# Altium PCB CT9042 Main Board.PcbDoc (part 1 of 2)
Units mm, origin at the board's own origin, x right, y up, seen from the top; angles counter-clockwise.
Board outline 242.29 x 155.23 mm, 4 copper layers (Top Layer, Layer 1, Layer 2, Bottom Layer), stack 1.794 mm thick; 436 components, 347 nets, 1449 pads, 165 vias.
Unrouted connection lines stored in the file: 759.
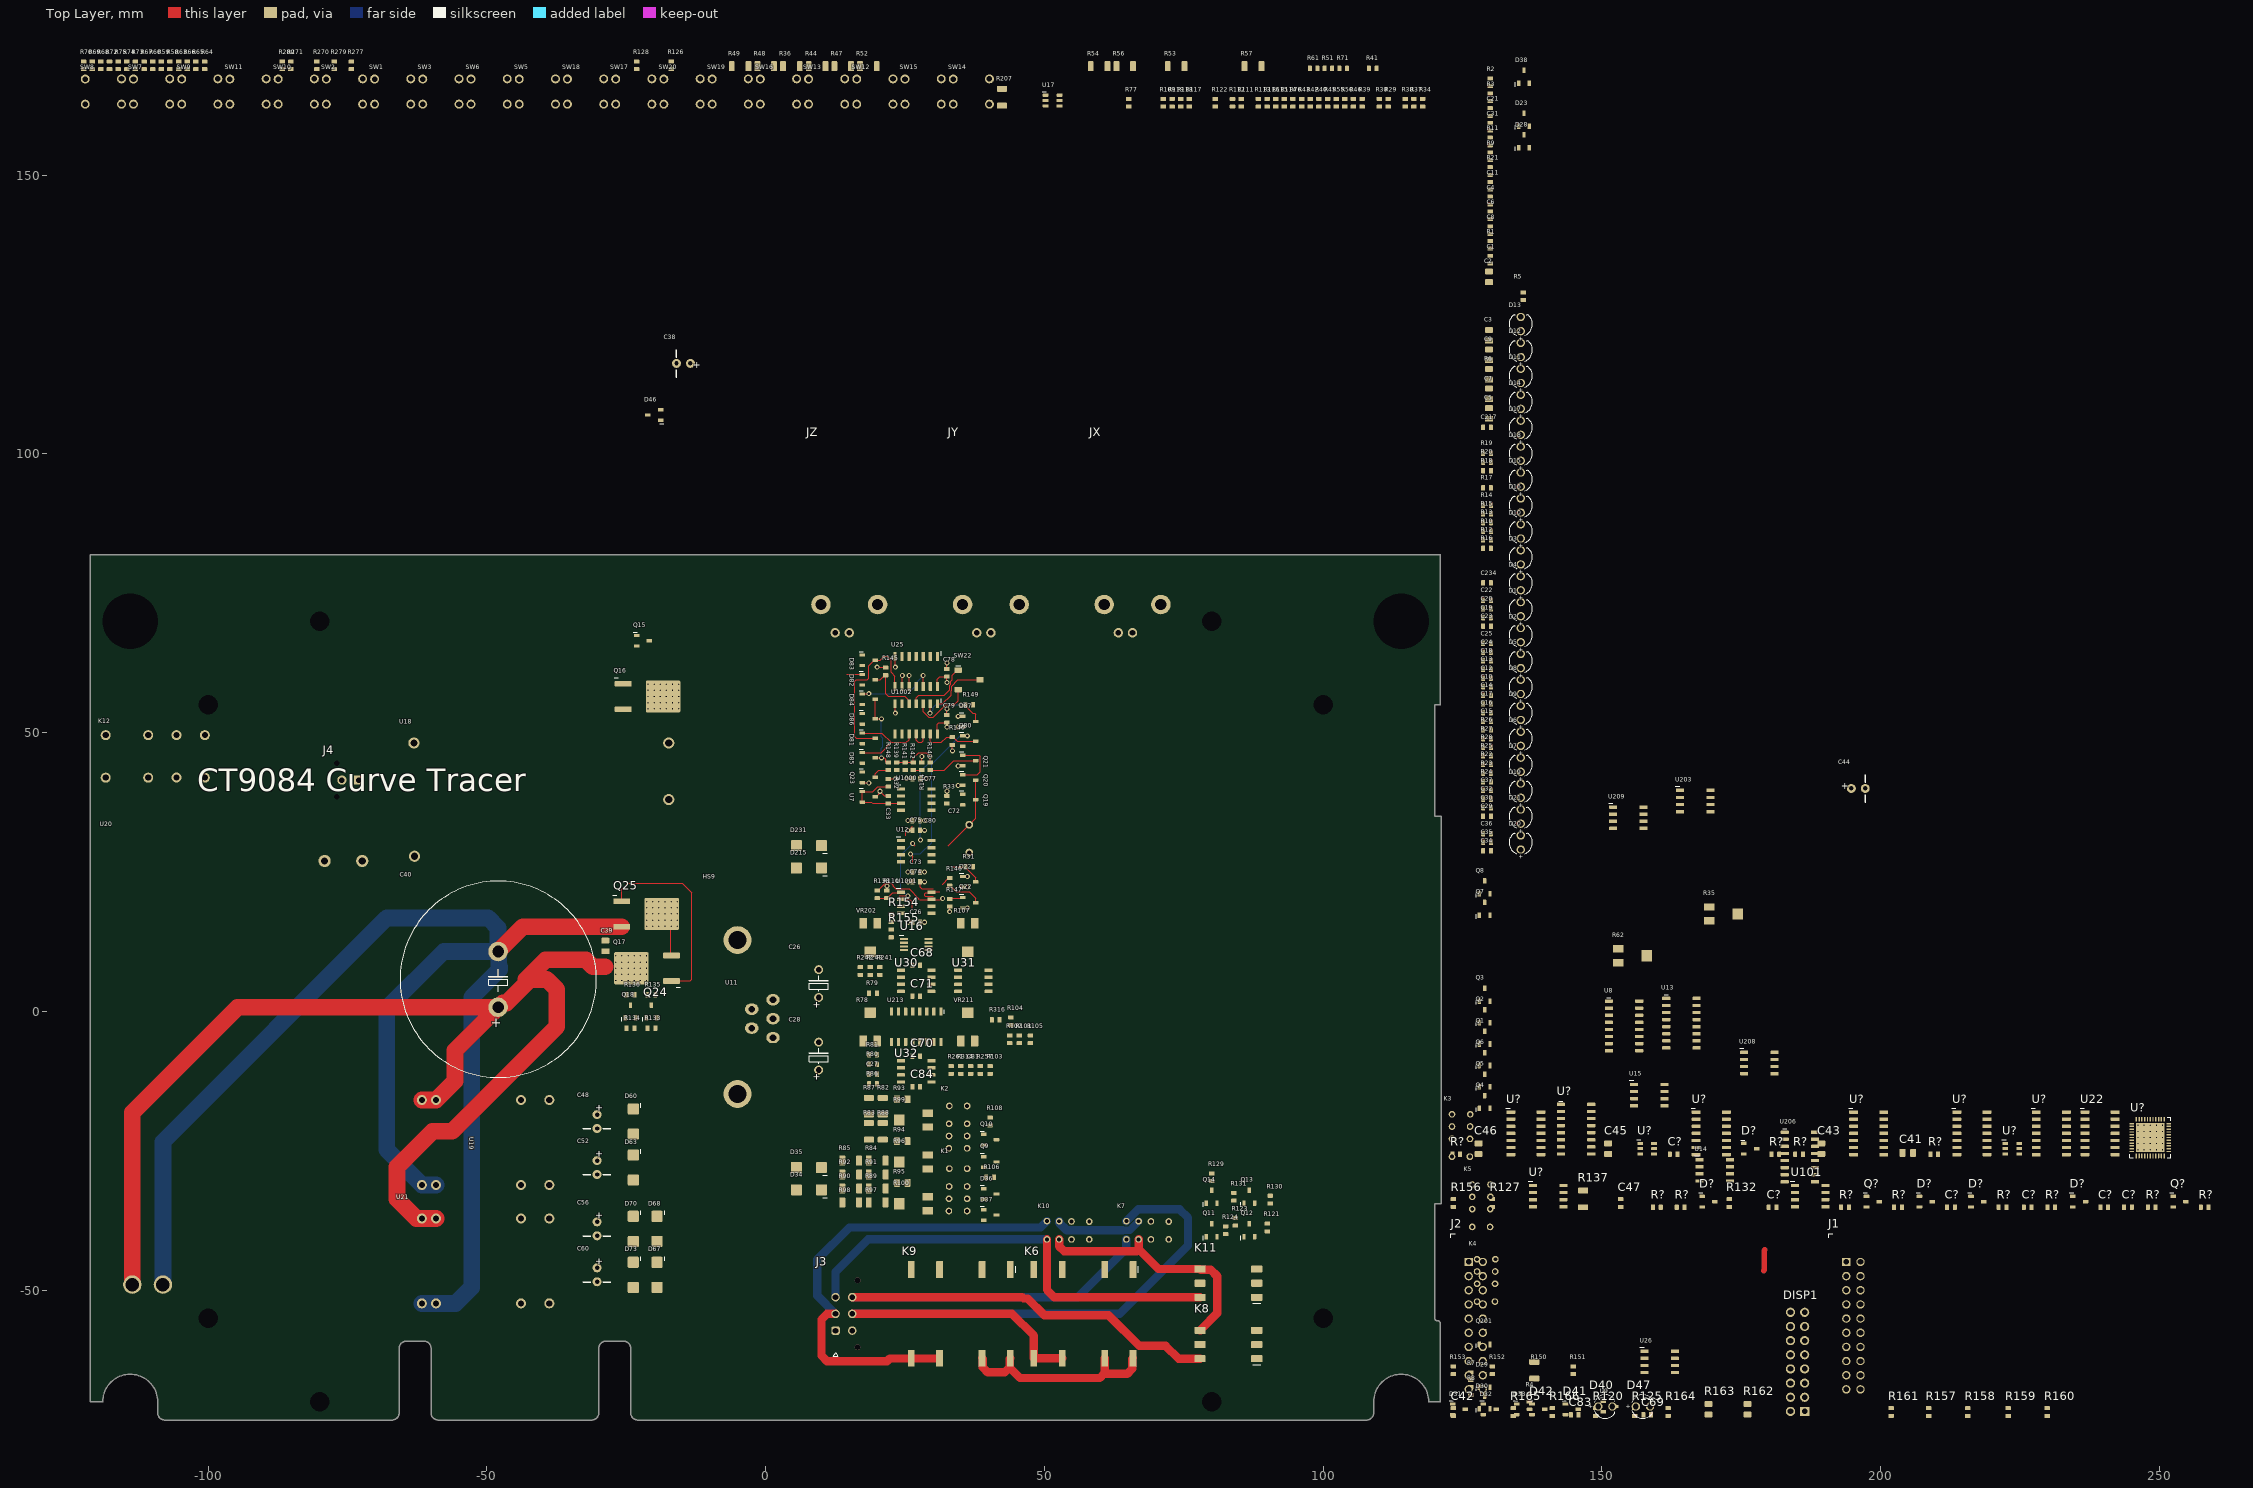
[diagram p0: Top Layer view]
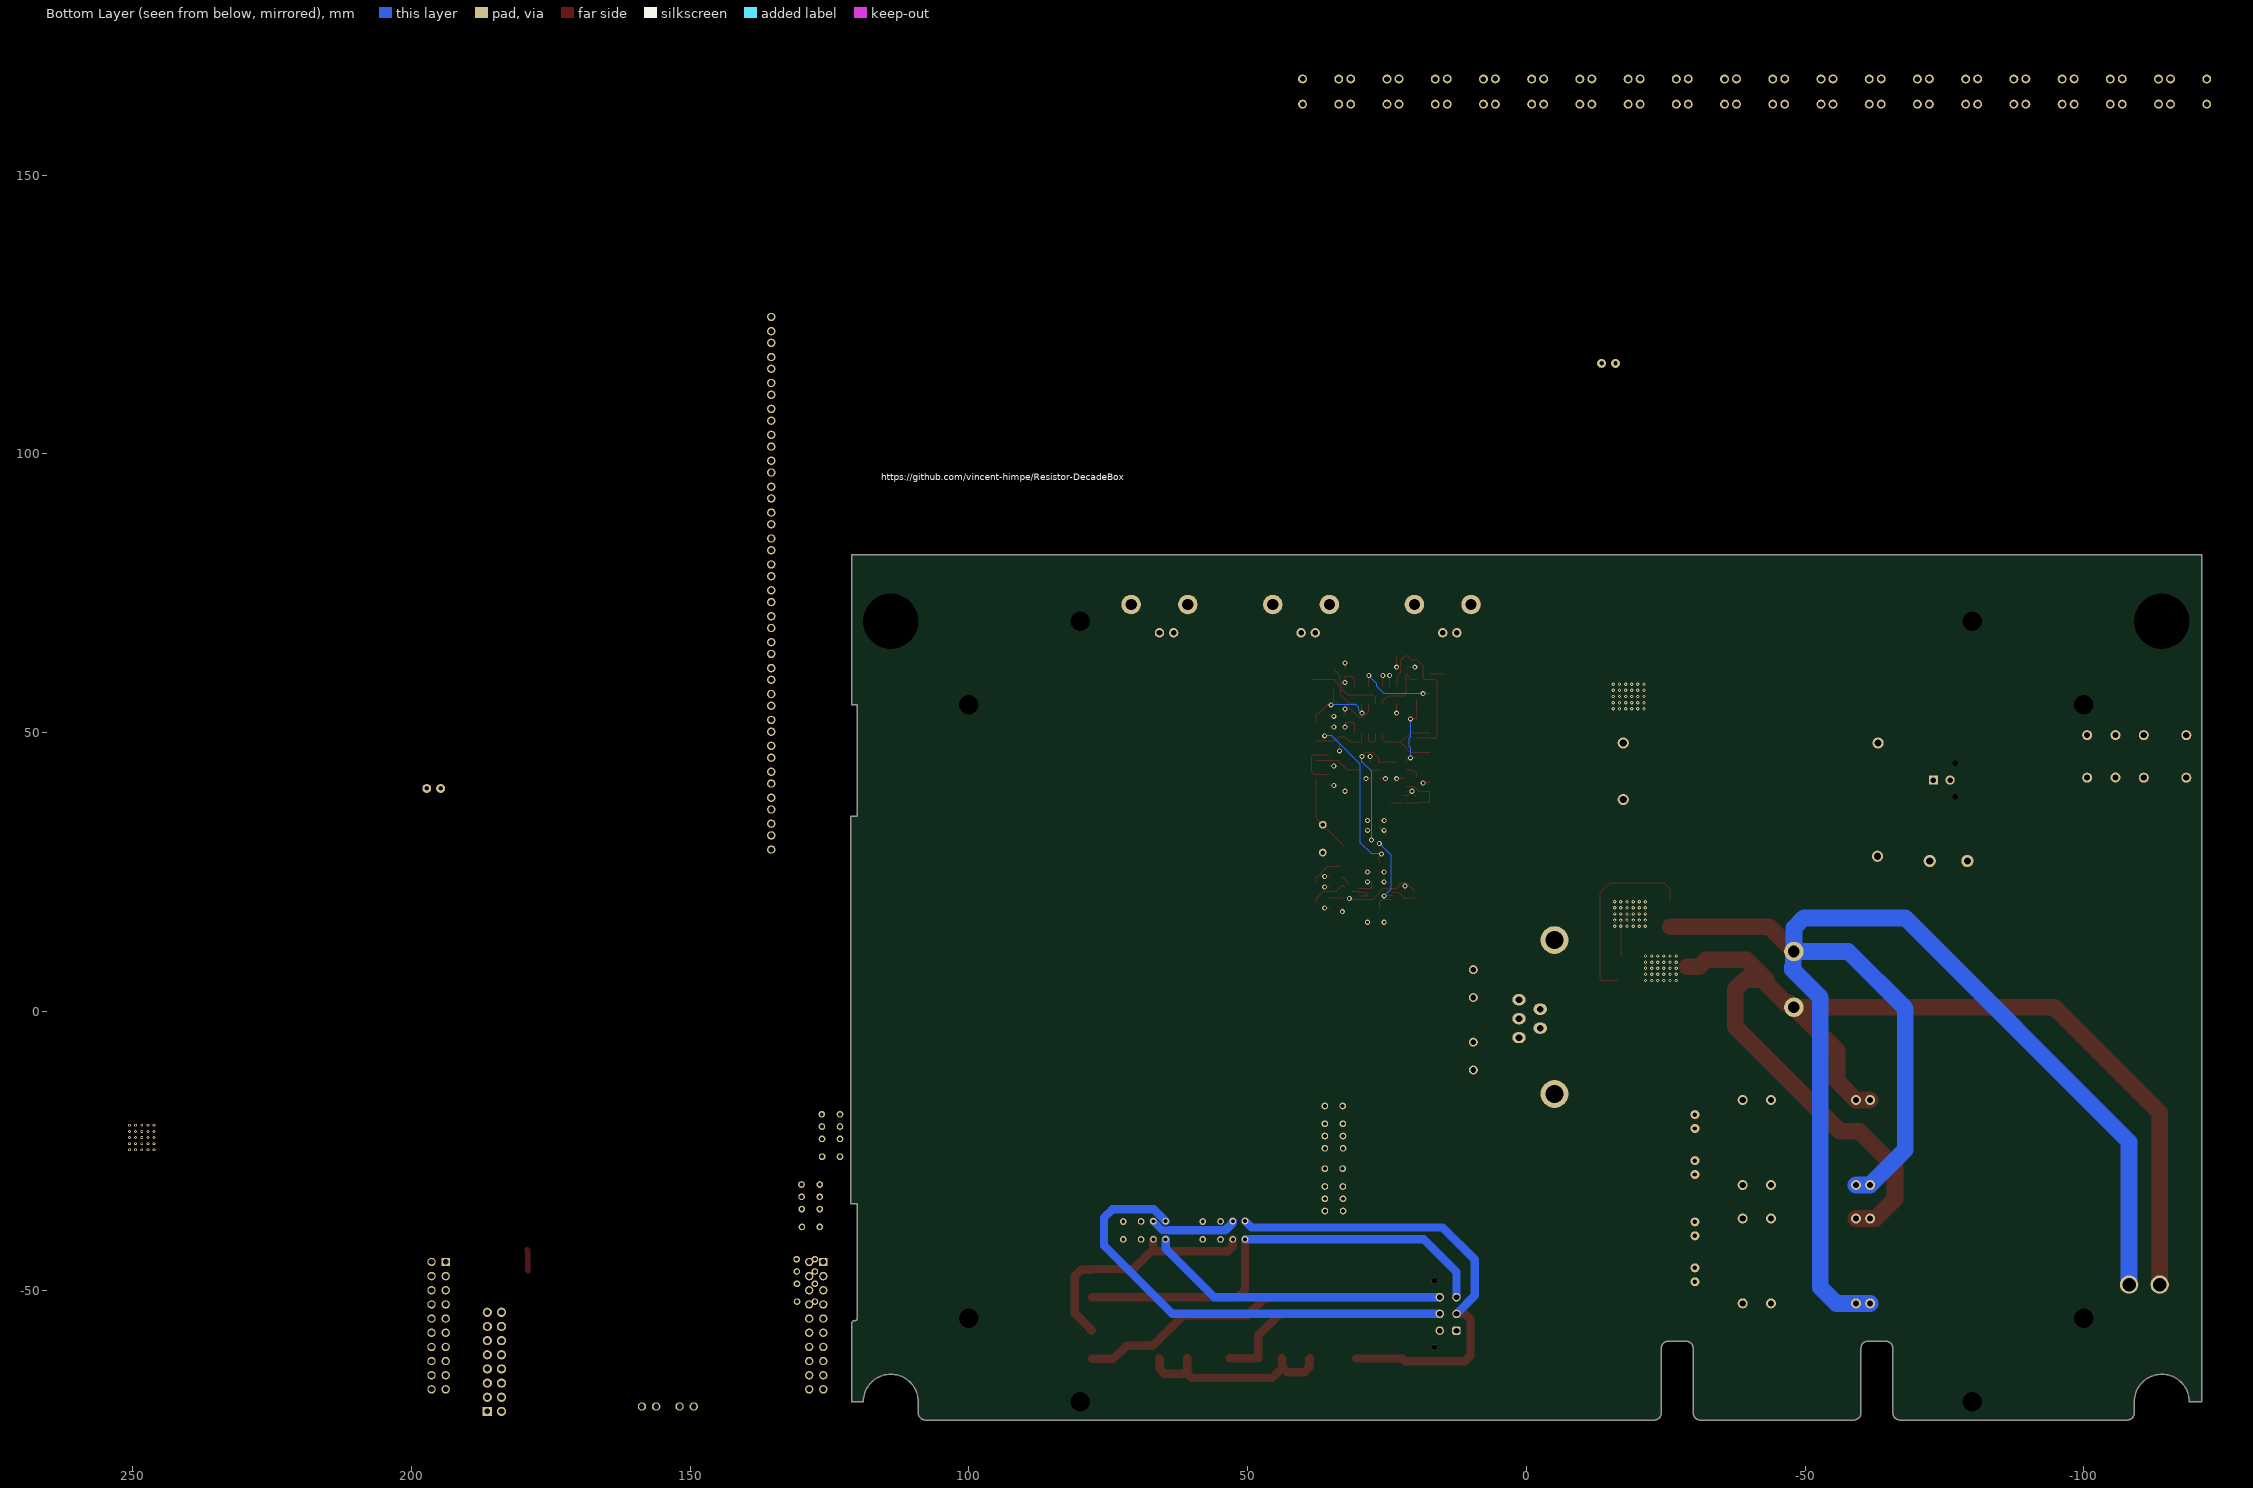
[diagram p1: Bottom Layer view, seen from below]
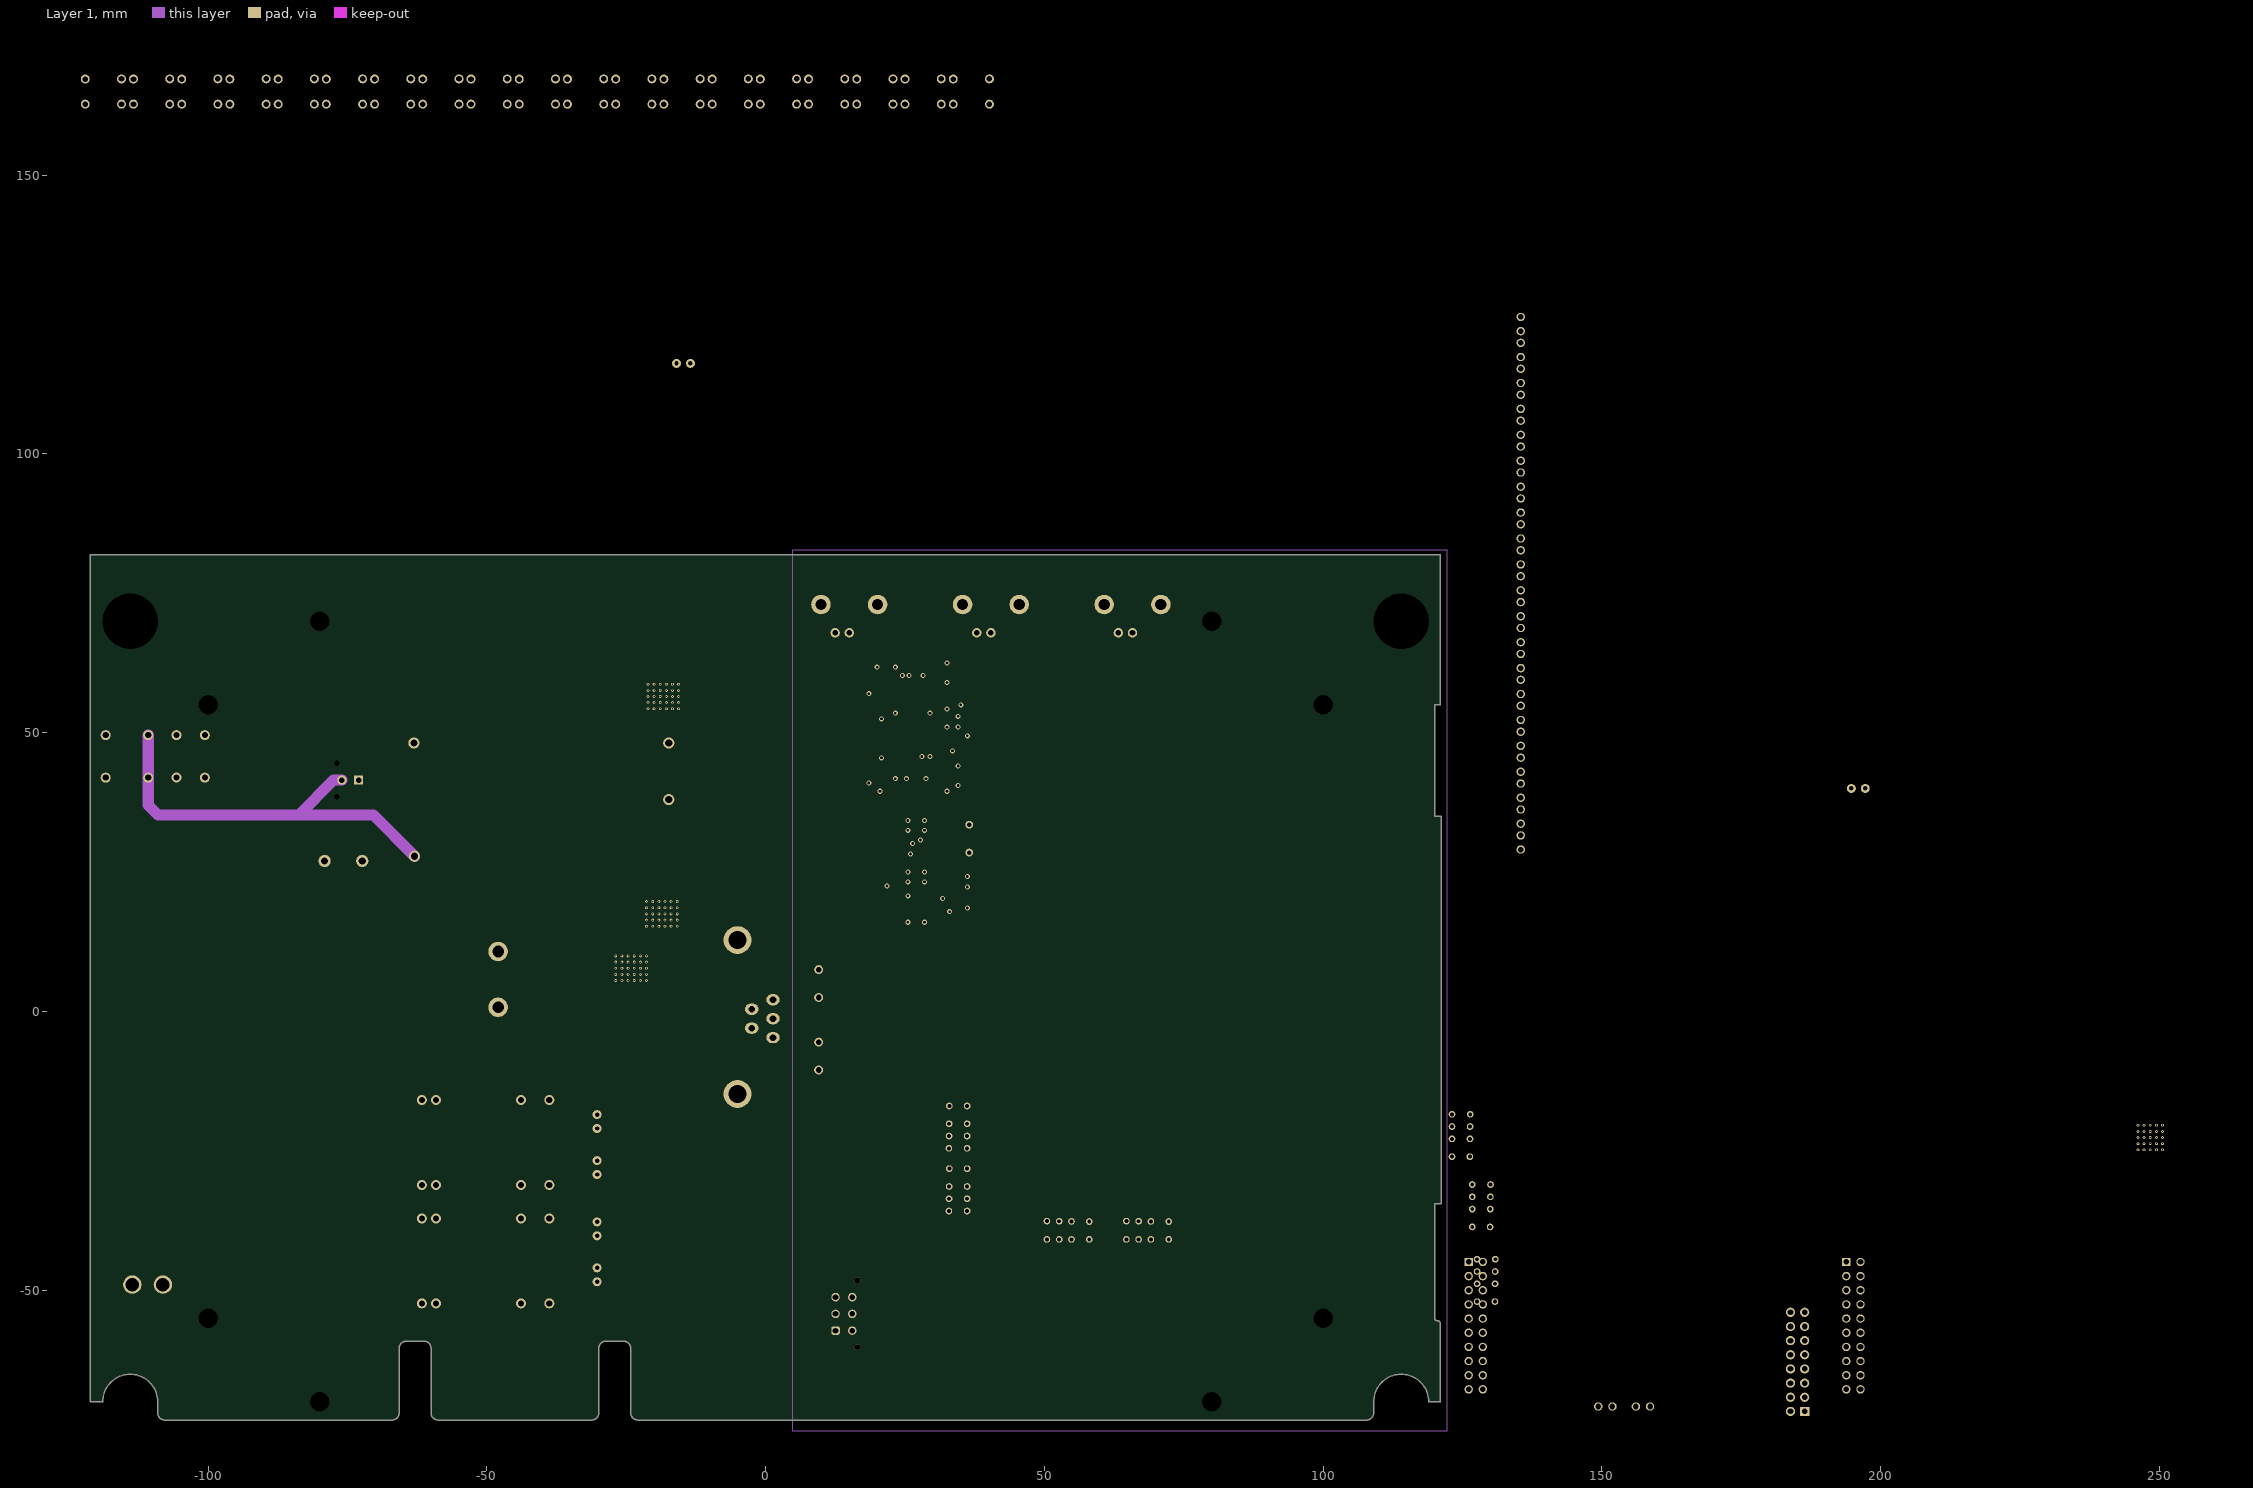
[diagram p2: Layer 1]
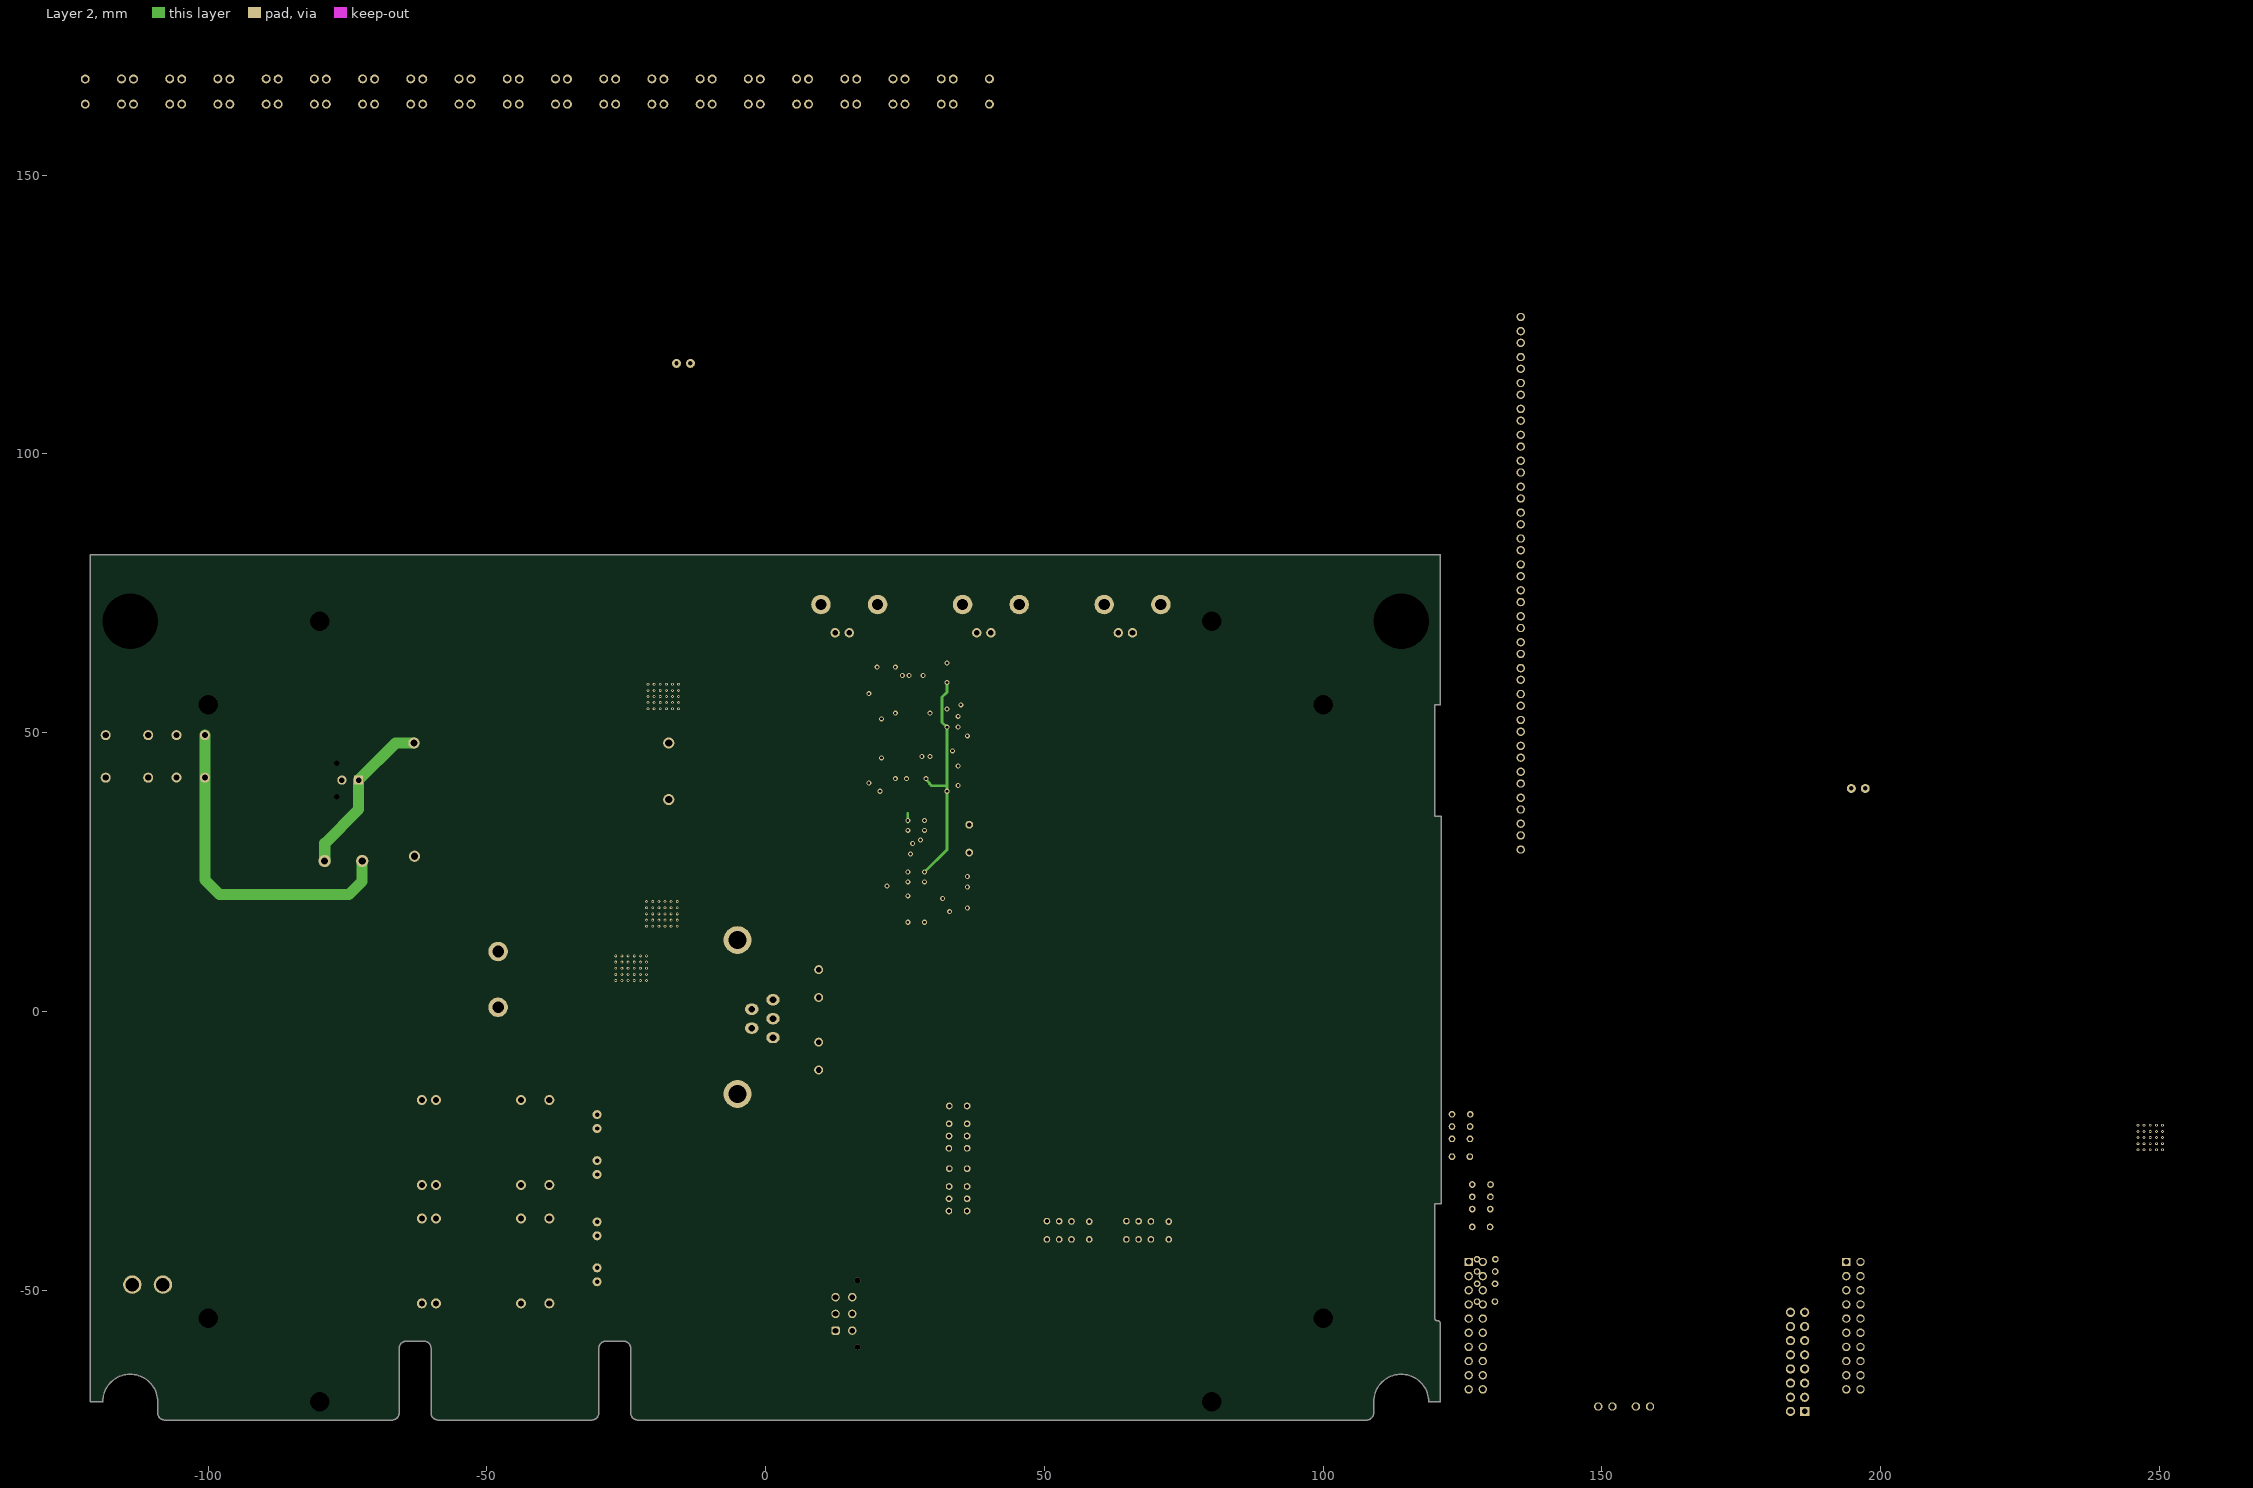
[diagram p3: Layer 2]

## Layer stack, top to bottom
Top Solder: solder mask 0.0102, Solder Resist, Dk 3.5
Top Layer: signal copper 0.0356
Dielectric 2: prepreg 0.1016, Core-009, Dk 4.5
Layer 1: signal copper 0.035
Dielectric 1: dielectric 1.45, FR-4, Dk 4.8
Layer 2: signal copper 0.035
Dielectric 3: prepreg 0.1016, Core-009, Dk 4.5
Bottom Layer: signal copper 0.0356
Bottom Solder: solder mask 0.0102, Solder Resist, Dk 3.5

## Board outline
-109.069,-72.005 ccw(c-107.774,-72.005) -107.774,-73.3 -67.045,-73.3 ccw(c-67.045,-72.005) -65.75,-72.005 -65.75,-60.401 cw(c-64.505,-60.401) -64.505,-59.157 -61.273,-59.157 cw(c-61.273,-60.401) -60.028,-60.401 -60.028,-72.005 ccw(c-58.733,-72.005) -58.733,-73.3 -31.232,-73.3 ccw(c-31.232,-72.005) -29.937,-72.005 -29.937,-60.401 cw(c-28.692,-60.401) -28.692,-59.157 -25.46,-59.157 cw(c-25.46,-60.401) -24.216,-60.401 -24.216,-72.005 ccw(c-22.92,-72.005) -22.92,-73.3 107.774,-73.3 107.775,-73.3 ccw(c107.774,-72.005) 109.069,-72.005 109.069,-70.508 109.075,-70.489 109.075,-70 cw(c114,-70) 118.925,-70 118.95,-70.025 121,-70.025 121.025,-70 121.025,-56 ccw(c120.5,-56) 120.5,-55.475 cw(c120.5,-55) 120.025,-55 120.025,-34.525 121.125,-34.525 121.15,-34.5 121.15,35 121.125,35.025 120.025,35.025 120.025,54.975 121,54.975 121.025,55 121.025,81.9 121,81.925 -121.111,81.925 -121.136,81.9 -121.136,-70 -121.111,-70.025 -118.95,-70.025 -118.925,-70 cw(c-114,-70) -109.075,-70 -109.075,-70.489 -109.069,-70.508

## Design rules (kind name [scope] priority, off if disabled: settings)
Clearance [All] p1: gap=0.15 ignorepadtopadclearanceinfootprint=FALSE
ComponentClearance [All] p1 off: gap=0.254 collisioncheckmode=3 verticalgap=0.254 showdistances=FALSE
Height [All] p1 off: minheight=0 maxheight=25.4 prefheight=12.7
MinimumSolderMaskSliver [All] p1: minsoldermaskwidth=0.1
PolygonConnect [All] p1: connectstyle=Relief reliefconductorwidth=0.254 reliefentries=4 polygonreliefangle="90 Angle" airgapwidth=0.254
RoutingVias [All] p1: holewidth=0.9 width=0.9 viastyle="Through Hole" minholewidth=0.2 minwidth=0.5 maxholewidth=0.5 maxwidth=1
SolderMaskExpansion [All] p1: expansion=0.102 istentingtop=FALSE
SupplyNets "Schematic Supply Nets_6" [InNet('N48V')] p1: voltage=0.000
SupplyNets "Schematic Supply Nets_17" [InNet('P15VA')] p2: voltage=0.000
SupplyNets "Schematic Supply Nets_15" [InNet('FGND')] p3: voltage=0.000
SupplyNets "Schematic Supply Nets_14" [InNet('N5VA')] p4: voltage=0.000
SupplyNets "Schematic Supply Nets_13" [InNet('AGND')] p5: voltage=0.000
SupplyNets "Schematic Supply Nets_11" [InNet('GND')] p6: voltage=0.000
SupplyNets "Schematic Supply Nets_10" [InNet('P5VA')] p7: voltage=0.000
SupplyNets "Schematic Supply Nets_7" [InNet('FP5VD')] p8: voltage=0.000
SupplyNets "Schematic Supply Nets_4" [InNet('VREF')] p9: voltage=0.000
SupplyNets "Schematic Supply Nets_3" [InNet('P5VD')] p10: voltage=0.000
SupplyNets "Schematic Supply Nets_2" [InNet('P48V')] p11: voltage=0.000
SupplyNets "Schematic Supply Nets_1" [InNet('P5VREL')] p12: voltage=0.000
SupplyNets "Schematic Supply Nets" [InNet('N15VA')] p13: voltage=0.000
Width [All] p1: maxlimit=3 minlimit=0.15 preferedwidth=0.2
27 further rules are at their usual default settings.

## Classes and differential pairs
component class "CT9042 Toplevel": JX JY JZ
component class U_SWEEP: C33 C72 C73 C74 C75 C76 C77 C78 C79 C80 D22 D80 D81 D82 D83 D84 D85 D86 D87 D217 D220 D221 D222 D223 D224 D225 D226 D227 D228 D229 Q19 Q20 Q21 Q22 Q23 Q217 R31 R32 R33 R110 R138 R139 R140 R141 R142 R143 R144 R145 R146 R147 R148 R149 R154 R155 SW22 U7 U12 U16 U25 U1000 U1001 U1002
component class U_PSU: * *1 *2 C38 C39 C40 C42 C44 C48 C52 C56 C60 D41 D42 D46 D60 D63 D67 D68 D70 D73 J4 J9 K12 Q15 Q16 Q17 Q18 Q24 Q25 R120 R125 R133 R134 R135 R136 U18 U19 U20 U21
component class U_PROCESSOR: C41 C43 C45 C46 C? D? R? U4 U5 U6 U22 U?
component class U_POWERMUX: D39 D43 D44 D45 J3 J5 J6 J7 J8 K6 K7 K8 K9 K10 K11 P1 P2 P3 P4 P5 P6 Q11 Q12 Q13 Q14 R119 R121 R122 R123 R124 R126 R128 R129 R130 R131 U17
component class U_POWERAMP: C26 C27 C28 C68 C69 C70 C71 C81 C83 C84 D34 D35 D36 D37 D215 D231 HS9 K1 K2 Q9 Q10 R78 R79 R80 R81 R82 R83 R84 R85 R86 R87 R88 R89 R90 R91 R92 R93 R94 R95 R96 R97 R98 R99 R100 R101 R102 R103 R104 R105 R106 R107 R108 R241 R242 R243 R257 R261 R314 R316 U11 U30 U31 U32 U213 VR202 VR211
component class U_MULTIPLIER: C29 C30 C31 C32 C34 C35 C36 C37 C47 C217 C? D38 D? Q? R109 R111 R112 R113 R114 R115 R116 R117 R118 R127 R132 R137 R150 R151 R152 R153 R156 R270 R271 R277 R279 R280 R? U13 U14 U15 U26 U101 U?
component class U_IBVG-DRIVER: C10 C11 C12 C13 C14 C15 C16 C17 C18 C19 C20 C21 C22 C23 C24 C25 C234 D23 D24 D25 D26 D27 D28 D29 D30 D31 D32 D33 K3 K4 K5 Q2 Q3 Q4 Q5 Q6 Q7 Q8 Q201 R34 R35 R36 R37 R38 R39 R40 R41 R42 R43 R44 R45 R46 R47 R48 R49 R50 R51 R52 R53 R54 R55 R56 R57 R58 R59 R60 R61 R62 R63 R64 R65 R66 R67 R68 R69 R70 R71 R72 R73 R74 R75 R76 R77 R207 U8 U9 U10 U203 U206 U208 U209
component class U_FrontPanel: C1 C2 C3 C4 C5 C6 C7 C8 C9 D1 D2 D3 D4 D5 D6 D7 D8 D9 D10 D11 D12 D13 D14 D15 D16 D17 D18 D19 D20 D21 D40 D47 DISP1 J1 J2 Q1 R1 R2 R3 R4 R5 R6 R7 R8 R9 R10 R11 R12 R13 R14 R15 R16 R17 R18 R19 R20 R21 R22 R23 R24 R25 R26 R27 R28 R29 R30 R157 R158 R159 R160 R161 R162 R163 R164 R165 R166 SW1 SW2 SW3 SW4 SW5 SW6 SW7 SW8 SW9 SW10 SW11 SW12 SW13 SW14 SW15 SW16 SW17 SW18 SW19 SW20 U1 U2 U3

## Components (designator, comment, footprint, x,y, rotation, side; value= is the part's Value field where it differs from the comment)
C1 "CAP0603" CAPC0603 129.949,134.86 r90 top
C2 "CAP0805" CAPC0805 129.749,131.785 r90 top
C3 "CAP0805" CAPC0805 129.749,121.285 r90 top
C4 "CAP0603" CAPC0603 129.949,145.46 r90 top
C5 "CAP0805" CAPC0805 129.749,107.285 r90 top
C6 "CAP0603" CAPC0603 129.949,142.81 r90 top
C7 "CAP0805" CAPC0805 129.749,110.785 r90 top
C8 "CAP0603" CAPC0603 129.949,140.16 r90 top
C9 "CAP0805" CAPC0805 129.749,117.785 r90 top
C10 "CAP0603" CAPC0603 129.399,58.26 r180 top
C11 "CAP0603" CAPC0603 129.949,148.11 r90 top
C12 "CAP0603" CAPC0603 129.399,59.81 r180 top
C13 "CAP0603" CAPC0603 129.399,61.36 r180 top
C14 "CAP0603" CAPC0603 129.399,56.71 r180 top
C15 "CAP0603" CAPC0603 129.399,52.06 r180 top
C16 "CAP0603" CAPC0603 129.399,53.61 r180 top
C17 "CAP0603" CAPC0603 129.399,55.16 r180 top
C18 "CAP0603" CAPC0603 129.399,62.91 r180 top
C19 "CAP0603" CAPC0603 129.399,70.66 r180 top
C20 "CAP0603" CAPC0603 129.399,72.21 r180 top
C21 "CAP0603" CAPC0603 129.949,161.36 r90 top
C22 "CAP0603" CAPC0603 129.399,73.76 r180 top
C23 "CAP0603" CAPC0603 129.399,69.11 r180 top
C24 "CAP0603" CAPC0603 129.399,64.46 r180 top
C25 "CAP0603" CAPC0603 129.399,66.01 r180 top
C26 "CAP0603" CAPAE-KEMET-ESL476M100AH9AA 9.5,5 r90 top
C27 "CAP0603" CAPC0603 19.25,-11.25 r180 top
C28 "CAP0603" CAPAE-KEMET-ESL476M100AH9AA 9.5,-8 r90 top
C29 "CAP0603" CAPC0603 129.399,35.01 r180 top
C30 "CAP0603" CAPC0603 129.399,36.56 r180 top
C31 "CAP0603" CAPC0603 129.949,158.71 r90 top
C32 "CAP0603" CAPC0603 129.399,38.11 r180 top
C33 "CAP0603" CAPC0603 22,38 r90 top
C34 "CAP0603" CAPC0603 129.399,28.81 r180 top
C35 "CAP0603" CAPC0603 129.399,30.36 r180 top
C36 "CAP0603" CAPC0603 129.399,31.91 r180 top
C37 "CAP0603" CAPC0603 129.399,39.66 r180 top
C38 "CAP0603" CAPAE-KEMET-ESW476M035AE3AA -14.75,116.25 r180 top
C39 "CAP0805" CAPC0805 -28.75,11.75 r90 top
C40 "CAP0603" CAPAE-NICHICON-LGY2A222MELC30 -48,5.75 r90 top
C41 "CAP0805" CAPC0805 204.869,-25.365 r0 top
C42 "CAP0603" CAPC0603 123.369,-71.865 r90 top
C43 "CAP0805" CAPC0805 189.369,-24.615 r90 top
C44 "CAP0603" CAPAE-KEMET-ESW476M035AE3AA 196,40 r0 top
C45 "CAP0805" CAPC0805 151.119,-24.615 r90 top
C46 "CAP0805" CAPC0805 127.869,-24.615 r90 top
C47 "CAP0603" CAPC0603 153.369,-34.365 r90 top
C48 "CAP0603" CAPAE-KEMET-ESW476M035AE3AA -30.25,-19.75 r270 top
C52 "CAP0603" CAPAE-KEMET-ESW476M035AE3AA -30.25,-28 r270 top
C56 "CAP0603" CAPAE-KEMET-ESW476M035AE3AA -30.25,-39 r270 top
C60 "CAP0603" CAPAE-KEMET-ESW476M035AE3AA -30.25,-47.25 r270 top
C68 "CAP0603" CAPC0603 27,8.25 r180 top
C69 "CAP0603" CAPC0603 158.119,-72.365 r0 top
C70 "CAP0603" CAPC0603 27,-8 r180 top
C71 "CAP0603" CAPC0603 27,2.75 r180 top
C72 "CAPF" CAPF50P720X720 36.5,31 r270 top
C73 "CAP0603" CAPC0603 27,25 r180 top
C74 "CAP0603" CAPC0603 27,23.25 r180 top
C75 "CAP0603" CAPC0603 27,32.5 r0 top
C76 "CAP0603" CAPC0603 27,16 r180 top
C77 "CAP0603" CAPC0603 27,41.75 r180 top
C78 "CAP0603" CAPC0603 32.5,60.75 r90 top
C79 "CAP0603" CAPC0603 32.5,52.5 r90 top
C80 "CAP0603" CAPC0603 27,34.25 r180 top
C81 "CAP0603" CAPC0603 36.75,-10.5 r270 top
C83 "CAP0603" CAPC0603 145.119,-72.365 r0 top
C84 "CAP0603" CAPC0603 27,-13.5 r180 top
C217 "CAP0603" CAPC0603 129.399,104.76 r180 top
C234 "CAP0603" CAPC0603 129.399,76.86 r180 top
C? "CAP0603" CAPC0603 226.369,-35.115 r0 top
C? "CAP0603" CAPC0603 240.119,-35.115 r0 top
C? "CAP0603" CAPC0603 180.619,-35.115 r0 top
C? "CAP0603" CAPC0603 162.869,-25.615 r0 top
C? "CAP0603" CAPC0603 244.369,-35.115 r0 top
C? "CAP0603" CAPC0603 212.619,-35.115 r0 top
D1 "LED-3MM-GREEN" LED-3MM-GREEN 135.449,72.161 r90 top
D2 "LED-3MM-GREEN" LED-3MM-GREEN 135.449,67.511 r90 top
D3 "LED-3MM-GREEN" LED-3MM-GREEN 135.449,81.461 r90 top
D4 "LED-3MM-GREEN" LED-3MM-GREEN 135.449,76.811 r90 top
D5 "LED-3MM-GREEN" LED-3MM-GREEN 135.449,62.861 r90 top
D6 "LED-3MM-GREEN" LED-3MM-GREEN 135.449,48.911 r90 top
D7 "LED-3MM-GREEN" LED-3MM-GREEN 135.449,44.261 r90 top
D8 "LED-3MM-GREEN" LED-3MM-GREEN 135.449,58.211 r90 top
D9 "LED-3MM-GREEN" LED-3MM-GREEN 135.449,53.561 r90 top
D10 "LED-3MM-GREEN" LED-3MM-GREEN 135.449,86.111 r90 top
D11 "LED-3MM-GREEN" LED-3MM-GREEN 135.449,114.011 r90 top
D12 "LED-3MM-GREEN" LED-3MM-GREEN 135.449,118.661 r90 top
D13 "LED-3MM-GREEN" LED-3MM-GREEN 135.449,123.311 r90 top
D14 "LED-3MM-GREEN" LED-3MM-GREEN 135.449,109.361 r90 top
D15 "LED-3MM-GREEN" LED-3MM-GREEN 135.449,95.411 r90 top
D16 "LED-3MM-GREEN" LED-3MM-GREEN 135.449,90.761 r90 top
D17 "LED-3MM-GREEN" LED-3MM-GREEN 135.449,104.711 r90 top
D18 "LED-3MM-GREEN" LED-3MM-GREEN 135.449,100.061 r90 top
D19 "LED-3MM-GREEN" LED-3MM-GREEN 135.449,39.611 r90 top
D20 "LED-3MM-GREEN" LED-3MM-GREEN 135.449,30.311 r90 top
D21 "LED-3MM-GREEN" LED-3MM-GREEN 135.449,34.961 r90 top
D22 "CMPD6001S" SOT23 36.5,23.25 r0 top
D23 "CMPD6001S" SOT23 136.024,159.961 r90 top
D28 "CMPD6001S" SOT23 136.024,156.111 r90 top
D29 "CMPD6001S" SOT23 128.974,-66.29 r90 top
D30 "CMPD6001S" SOT23 128.974,-70.14 r90 top
D31 "BAS16" SOT23 124.369,-71.365 r0 top
D32 "BAS16" SOT23 129.869,-71.365 r0 top
D33 "BAS16" SOT23 135.869,-71.365 r0 top
D34 "NRVA4007" DO214AC 7.75,-32 r180 top
D35 "NRVA4007" DO214AC 7.75,-28 r180 top
D36 "BAS16" SOT23 40.25,-32.75 r0 top
D37 "BAS16" SOT23 40.25,-36.5 r0 top
D38 "CMPD6001S" SOT23 136.024,167.661 r90 top
D40 "LED-3MM-GREEN" LED-3MM-GREEN 150.619,-70.865 r0 top
D41 "BAS16" SOT23 144.619,-71.365 r0 top
D42 "BAS16" SOT23 138.619,-71.365 r0 top
D46 "BAS16" SOT23 -20,107 r180 top
D47 "LED-3MM-GREEN" LED-3MM-GREEN 157.369,-70.865 r0 top
D60 "NRVA4007" DO214AC -23.75,-19.75 r270 top
D63 "NRVA4007" DO214AC -23.75,-28 r270 top
D67 "NRVA4007" DO214AC -19.5,-47.25 r270 top
D68 "NRVA4007" DO214AC -19.5,-39 r270 top
D70 "NRVA4007" DO214AC -23.75,-39 r270 top
D73 "NRVA4007" DO214AC -23.75,-47.25 r270 top
D80 "BAS16" SOT23 36.5,48.5 r0 top
D81 "BAS16" SOT23 18.5,49 r0 top
D82 "BAS16" SOT23 18.5,59.5 r0 top
D83 "BAS16" SOT23 18.5,63 r0 top
D84 "BAS16" SOT23 18.5,56 r0 top
D85 "BAS16" SOT23 18.5,45.5 r0 top
D86 "BAS16" SOT23 18.5,52.5 r0 top
D87 "CMPD6001S" SOT23 36.5,52 r0 top
D215 "NRVA4007" DO214AC 7.75,25.75 r180 top
D231 "NRVA4007" DO214AC 7.75,29.75 r180 top
D? "BAS16" SOT23 169.119,-34.115 r0 top
D? "BAS16" SOT23 208.119,-34.115 r0 top
D? "BAS16" SOT23 217.369,-34.115 r0 top
D? "PESD2USB5" SOT23 176.619,-24.615 r0 top
D? "BAS16" SOT23 235.619,-34.115 r0 top
DISP1 "DISPLAY-LCD-2X40" CONNECTOR-GENERIC-PINHEADER-2X8 185.119,-62.865 r90 top
HS9 "HEATSINK-CUI-HSS01-B20-CP" HEATSINK-CUI-HSS01-B20-CP -9.5,-1 r90 top
J1 "BOXHEADER-10X2" "CONNECTOR GENERIC-BOXHEADER-2X10" 195.119,-56.365 r0 top
J2 "BOXHEADER-10X2" "CONNECTOR GENERIC-BOXHEADER-2X10" 127.369,-56.365 r0 top
J3 "CONN-MOLEX-430450613" CONN-MOLEX-430450613 14.5,-54.25 r270 top
J4 "CONNECTOR-MOLEX-43045-0202" CONN-MOLEX-430450214 -75,41.5 r90 top
JX "x" CONN-BNC-RA-TE-CONBNC002 65.8,73 r90 top locked
JY "Y" CONN-BNC-RA-TE-CONBNC002 40.4,73 r90 top locked
JZ "Z" CONN-BNC-RA-TE-CONBNC002 15,73 r90 top locked
K1 "RELAY-KEMET-UA2-5NJ" RELAY-KEMET-UA2-5NJ 34.5,-32 r270 top
K2 "RELAY-KEMET-UA2-5NJ" RELAY-KEMET-UA2-5NJ 34.5,-20.75 r270 top
K3 "RELAY-KEMET-UA2-5NJ" RELAY-KEMET-UA2-5NJ 124.75,-22.25 r90 top
K4 "RELAY-KEMET-UA2-5NJ" RELAY-KEMET-UA2-5NJ 129.25,-48.25 r90 top
K5 "RELAY-KEMET-UA2-5NJ" RELAY-KEMET-UA2-5NJ 128.388,-34.85 r90 top
K6 "RELAY-IXYS-CPC1907B" SO508P1676-8N 57,-54.25 r270 top
K7 "RELAY-KEMET-UA2-5NJ" RELAY-KEMET-UA2-5NJ 68.5,-39.25 r180 top
K8 "RELAY-IXYS-LCA701S" SO254P960-6N 83,-59.75 r90 top
K9 "RELAY-IXYS-CPC1907B" SO508P1676-8N 35,-54.25 r270 top
K10 "RELAY-KEMET-UA2-5NJ" RELAY-KEMET-UA2-5NJ 54.25,-39.25 r180 top
K11 "RELAY-IXYS-LCA701S" SO254P960-6N 83,-48.75 r90 top
K12 "RELAY-CIT-J104B2C5VDC.20S" RELAY-CIT-J104B2C5VDC.20S -109.5,45.75 r0 top
Q1 "BC847B" SOT23 128.974,-4.69 r90 top
Q2 "BC847B" SOT23 128.974,-0.84 r90 top
Q3 "BC857" SOT23 128.974,3.01 r90 top
Q4 "BC847B" SOT23 128.974,-16.24 r90 top
Q5 "BC857" SOT23 128.974,-12.39 r90 top
Q6 "BC847B" SOT23 128.974,-8.54 r90 top
Q7 "BC847B" SOT23 128.974,18.41 r90 top
Q8 "BC847B" SOT23 128.974,22.26 r90 top
Q9 "BC847B" SOT23 40.25,-27 r0 top
Q10 "BC847B" SOT23 40.25,-23 r0 top
Q11 "BC847B" SOT23 80,-39.25 r90 top
Q12 "BC847B" SOT23 86.75,-39.25 r90 top
Q13 "BC847B" SOT23 86.75,-33.25 r90 top
Q14 "BC847B" SOT23 80,-33.25 r90 top
Q15 "SI2336" SOT23 -22,66.5 r0 top
Q16 "DMP10H400" DPAK -22,56.5 r0 top
Q17 "DMN10H170" DPAK -20.5,7.75 r180 top
Q18 "BC857" SOT23 -24.25,0 r90 top
Q19 "BC857" SOT23 36.5,38 r0 top
Q20 "SI2336" SOT23 36.5,41.5 r0 top
Q21 "SI2336" SOT23 36.5,45 r0 top
Q22 "SI2336" SOT23 36.5,19.5 r0 top
Q23 "SI2336" SOT23 18.5,42 r0 top
Q24 "BC847B" SOT23 -20.5,0 r90 top
Q25 "DMP10H400" DPAK -22.25,17.5 r0 top
Q201 "BC857" SOT23 128.974,-58.59 r90 top
Q? "BC857" SOT23 198.619,-34.115 r0 top
Q? "BC857" SOT23 253.619,-34.115 r0 top
R1 "RESC0603" RESC0603 129.949,137.51 r90 top value=10K
R2 "RESC0603" RESC0603 129.949,166.66 r90 top value=10K
R3 "RESC0603" RESC0603 129.949,164.01 r90 top value=10K
R4 "RESC0603" RESC0603 137,-69.31 r90 top value=10K
R5 "RESC0603" RESC0603 135.899,128.311 r90 top value=10K
R6 "RESC0805" RESC0805 129.749,114.285 r90 top
R7 "RESC0603" RESC0603 126.474,-65.44 r90 top value=1K
R8 "RESC0603" RESC0603 126.474,-68.09 r90 top value=470R
R9 "RESC0603" RESC0603 129.949,153.41 r90 top value=470R
R10 "RESC0603" RESC0603 129.399,86.16 r180 top value=470R
R11 "RESC0603" RESC0603 129.949,156.06 r90 top value=470R
R12 "RESC0603" RESC0603 129.399,84.61 r180 top value=470R
R13 "RESC0603" RESC0603 129.399,87.71 r180 top value=470R
R14 "RESC0603" RESC0603 129.399,90.81 r180 top value=470R
R15 "RESC0603" RESC0603 129.399,89.26 r180 top value=470R
R16 "RESC0603" RESC0603 129.399,83.06 r180 top value=470R
R17 "RESC0603" RESC0603 129.399,93.91 r180 top value=470R
R18 "RESC0603" RESC0603 129.399,97.01 r180 top value=470R
R19 "RESC0603" RESC0603 129.399,100.11 r180 top value=470R
R20 "RESC0603" RESC0603 129.399,98.56 r180 top value=470R
R21 "RESC0603" RESC0603 129.949,150.76 r90 top value=470R
R22 "RESC0603" RESC0603 129.399,44.31 r180 top value=470R
R23 "RESC0603" RESC0603 129.399,42.76 r180 top value=470R
R24 "RESC0603" RESC0603 129.399,41.21 r180 top value=470R
R25 "RESC0603" RESC0603 129.399,45.86 r180 top value=470R
R26 "RESC0603" RESC0603 129.399,50.51 r180 top value=470R
R27 "RESC0603" RESC0603 129.399,48.96 r180 top value=470R
R28 "RESC0603" RESC0603 129.399,47.41 r180 top value=470R
R29 "RESC0603" RESC0603 111.639,163.008 r90 top value=10K
R30 "RESC0603" RESC0603 110.089,163.008 r90 top value=10K
R31 "RESC0603" RESC0603 36.5,26 r0 top value=511R
R32 "RESC0603" RESC0603 22,41 r270 top value=2K05
R33 "RESC0603" RESC0603 32.5,38 r270 top value=50K
R34 "RESC0603" RESC0603 117.839,163.008 r90 top value=2K37
R35 "TRIMMER-BOURNS-3214X-1-501" TRIMMER-BOURNS-3214X 171.8,17.5 r0 top value=500R
R36 "RESC1206" RESC1206 4.614,169.558 r0 top value=1K
R37 "RESC0603" RESC0603 116.289,163.008 r90 top value=2K05
R38 "RESC0603" RESC0603 114.739,163.008 r90 top value=1K27
R39 "RESC0603" RESC0603 106.989,163.008 r90 top value=10K
R40 "RESC0603" RESC0603 99.239,163.008 r90 top value=9K09
R41 "RESC0603" RESC0603 108.889,169.158 r0 top value=511R
R42 "RESC0603" RESC0603 97.689,163.008 r90 top value=10K
R43 "RESC0603" RESC0603 96.139,163.008 r90 top value=2K05
R44 "RESC1206" RESC1206 9.214,169.558 r0 top value=1K
R45 "RESC0603" RESC0603 100.789,163.008 r90 top value=1K27
R46 "RESC0603" RESC0603 105.439,163.008 r90 top value=2K49
R47 "RESC1206" RESC1206 13.814,169.558 r0 top value=18K
R48 "RESC1206" RESC1206 0.014,169.558 r0 top value=1K8
R49 "RESC1206" RESC1206 -4.586,169.558 r0 top value=200R
R50 "RESC0603" RESC0603 103.889,163.008 r90 top value=2K21
R51 "RESC0603" RESC0603 100.939,169.158 r0 top value=10K
R52 "RESC1206" RESC1206 18.414,169.558 r0 top value=18K
R53 "RESC1206" RESC1206 73.614,169.558 r0 top value=1K8
R54 "RESC1206" RESC1206 59.814,169.558 r0 top value=200R
R55 "RESC0603" RESC0603 102.339,163.008 r90 top value=2K21
R56 "RESC1206" RESC1206 64.414,169.558 r0 top value=220R
R57 "RESC1206" RESC1206 87.414,169.558 r0 top value=220R
R58 "RESC0603" RESC0603 -106.861,169.708 r90 top value=10K
R59 "RESC0603" RESC0603 -108.411,169.708 r90 top value=1K
R60 "RESC0603" RESC0603 -109.961,169.708 r90 top value=10K
R61 "RESC0603" RESC0603 98.289,169.158 r0 top value=10K
R62 "TRIMMER-BOURNS-3214X-1-501" TRIMMER-BOURNS-3214X 155.5,10 r0 top value=500R
R63 "RESC0603" RESC0603 -105.311,169.708 r90 top value=2M74
R64 "RESC0603" RESC0603 -100.661,169.708 r90 top value=4M75
R65 "RESC0603" RESC0603 -102.211,169.708 r90 top value=4K42
R66 "RESC0603" RESC0603 -103.761,169.708 r90 top value=1K
R67 "RESC0603" RESC0603 -111.511,169.708 r90 top value=10K
R68 "RESC0603" RESC0603 -119.261,169.708 r90 top value=10K
R69 "RESC0603" RESC0603 -120.811,169.708 r90 top value=2K05
R70 "RESC0603" RESC0603 -122.361,169.708 r90 top value=10K
R71 "RESC0603" RESC0603 103.589,169.158 r0 top value=10K
R72 "RESC0603" RESC0603 -117.711,169.708 r90 top value=2K05
R73 "RESC0603" RESC0603 -113.061,169.708 r90 top value=1K
R74 "RESC0603" RESC0603 -114.611,169.708 r90 top value=2K49
R75 "RESC0603" RESC0603 -116.161,169.708 r90 top value=2K49
R76 "RESC0603" RESC0603 94.589,163.008 r90 top value=10K
R77 "RESC0603" RESC0603 65.139,163.008 r90 top value=2K05
R78 "TRIMMER-BOURNS-3214X-1-103E" TRIMMER-BOURNS-3214X 18.75,-2.75 r90 top value=10K
R79 "RESC0603" RESC0603 19.25,3.25 r180 top value=2M74
R80 "RESC0603" RESC0603 19.25,-9.5 r180 top value=44K2
R81 "RESC0603" RESC0603 19.25,-7.75 r0 top value=2K21
R82 "RESC1206" RESC1206 21,-17 r270 top value=1K8
R83 "RESC1206" RESC1206 18.5,-21.5 r270 top value=180R
R84 "RESC1206" RESC1206 20,-26.75 r180 top value=20R
R85 "RESC1206" RESC1206 15.25,-26.75 r180 top value=20R
R86 "RESC0603" RESC0603 19.25,-13 r180 top value=2K21
R87 "RESC1206" RESC1206 18.5,-17 r270 top value=1K8
R88 "RESC1206" RESC1206 21,-21.5 r270 top value=180R
R89 "RESC1206" RESC1206 20,-31.75 r180 top value=20R
R90 "RESC1206" RESC1206 15.25,-31.75 r180 top value=20R
R91 "RESC1206" RESC1206 20,-29.25 r180 top value=20R
R92 "RESC1206" RESC1206 15.25,-29.25 r180 top value=20R
R93 "RESC0805" RESC0805 24.5,-15.75 r0 top value=2K49
R94 "RESC0805" RESC0805 24.5,-23.25 r180 top value=1K54
R95 "RESC0805" RESC0805 24.5,-30.75 r180 top value=1K54
R96 "TRIMMER-BOURNS-3214X-1-102E" TRIMMER-BOURNS-3214X 26.5,-27 r180 top value=1K
R97 "RESC1206" RESC1206 20,-34.25 r180 top value=20R
R98 "RESC1206" RESC1206 15.25,-34.25 r180 top value=20R
R99 "TRIMMER-BOURNS-3214X-1-102E" TRIMMER-BOURNS-3214X 26.5,-19.5 r180 top value=1K
R100 "TRIMMER-BOURNS-3214X-1-102E" TRIMMER-BOURNS-3214X 26.5,-34.5 r180 top value=1K
R101 "RESC0603" RESC0603 45.5,-5 r90 top value=10K
R102 "RESC0603" RESC0603 43.75,-5 r90 top value=10K
R103 "RESC0603" RESC0603 40.25,-10.5 r90 top value=44K2
R104 "RESC0603" RESC0603 44,-1.75 r90 top value=511K
R105 "RESC0603" RESC0603 47.5,-5 r90 top value=1M54
R106 "RESC0603" RESC0603 40.25,-29.75 r180 top value=2K05
R107 "TRIMMER-BOURNS-3214X-1-103E" TRIMMER-BOURNS-3214X 36.25,13.25 r270 top value=10K
R108 "RESC0603" RESC0603 40.25,-19.75 r90 top value=2K05
R109 "RESC0603" RESC0603 71.339,163.008 r90 top value=1K01
R110 "RESC0603" RESC0603 21.75,21 r90 top value=10K
R111 "RESC0603" RESC0603 85.289,163.008 r90 top value=2K49
R112 "RESC0603" RESC0603 83.739,163.008 r90 top value=9K09
R113 "RESC0603" RESC0603 88.389,163.008 r90 top value=2K21
R114 "RESC0603" RESC0603 93.039,163.008 r90 top value=2K49
R115 "RESC0603" RESC0603 91.489,163.008 r90 top value=2K21
R116 "RESC0603" RESC0603 89.939,163.008 r90 top value=100K
R117 "RESC0603" RESC0603 75.989,163.008 r90 top value=4M75
R118 "RESC0603" RESC0603 74.439,163.008 r90 top value=511R
R119 "RESC0603" RESC0603 72.889,163.008 r90 top value=511R
R120 "RESC0603" RESC0603 148.869,-71.865 r90 top value=10K
R121 "RESC0603" RESC0603 90,-38.75 r90 top value=1K
R122 "RESC0603" RESC0603 80.639,163.008 r90 top value=511R
R123 "RESC0603" RESC0603 84.25,-37.75 r270 top value=1K
R124 "RESC0603" RESC0603 82.5,-39.25 r270 top value=10K
R125 "RESC0603" RESC0603 155.869,-71.865 r90 top value=10K
R126 "RESC0603" RESC0603 -16.961,169.708 r90 top value=511R
R127 "RESC0603" RESC0603 130.369,-34.365 r90 top value=10K
R128 "RESC0603" RESC0603 -23.161,169.708 r90 top value=511R
R129 "RESC0603" RESC0603 80,-29.75 r90 top value=1K
R130 "RESC0603" RESC0603 90.5,-33.75 r90 top value=1K
R131 "RESC0603" RESC0603 84,-33.25 r90 top value=10K
R132 "RESC0603" RESC0603 172.869,-34.365 r90 top value=10K
R133 "RESC0603" RESC0603 -20.5,-3 r0 top value=10K
R134 "RESC0603" RESC0603 -24.25,-3 r0 top value=51K1
R135 "RESC0603" RESC0603 -20.5,3 r0 top value=1K
R136 "RESC0603" RESC0603 -24.25,3 r0 top value=51K1
R137 "RESC1206" RESC1206 146.619,-33.615 r90 top value=1K
R138 "RESC0603" RESC0603 20,21 r90 top value=10K
R139 "RESC0603" RESC0603 23.5,44 r270 top value=10K
R140 "RESC0603" RESC0603 33.5,48.5 r270 top value=10K
R141 "RESC0603" RESC0603 25,44 r270 top value=10K
R142 "RESC0603" RESC0603 26.5,44 r270 top value=10K
R143 "RESC0603" RESC0603 29.5,44 r90 top value=10R
R144 "RESC0603" RESC0603 28,44 r90 top value=10K
R145 "RESC0603" RESC0603 21.5,61 r90 top value=10K
R146 "RESC0603" RESC0603 33,23.25 r270 top value=10K
R147 "RESC0603" RESC0603 33,19.5 r90 top value=10K
R148 "RESC0603" RESC0603 22,44 r90 top value=10K
R149 "RESC0603" RESC0603 36.5,55 r0 top value=511R
R150 "RESC1206" RESC1206 137.869,-64.365 r90 top value=1K
R151 "RESC0603" RESC0603 144.869,-64.365 r90 top value=10K
R152 "RESC0603" RESC0603 130.369,-64.365 r90 top value=10K
R153 "RESC0603" RESC0603 123.369,-64.365 r90 top value=10K
R154 "RESC0603" RESC0603 22.5,16.75 r270 top value=10K
R155 "RESC0603" RESC0603 22.5,14 r90 top value=10K
R156 "RESC0603" RESC0603 123.369,-34.365 r90 top value=10K
R157 "RESC0603" RESC0603 208.619,-71.865 r90 top value=10K
R158 "RESC0603" RESC0603 215.619,-71.865 r90 top value=10K
R159 "RESC0603" RESC0603 222.869,-71.865 r90 top value=10K
R160 "RESC0603" RESC0603 229.869,-71.865 r90 top value=10K
R161 "RESC0603" RESC0603 201.869,-71.865 r90 top value=470R
R162 "RESC0805" RESC0805 176.119,-71.365 r90 top
R163 "RESC0805" RESC0805 169.119,-71.365 r90 top
R164 "RESC0603" RESC0603 161.869,-71.865 r90 top value=10K
R165 "RESC0603" RESC0603 134.119,-71.865 r90 top value=470R
R166 "RESC0603" RESC0603 141.119,-71.865 r90 top value=470R
R207 "RESC1206" RESC1206 42.389,163.983 r90 top value=1K
R241 "RESC0603" RESC0603 20.5,7.25 r90 top value=4M75
R242 "RESC0603" RESC0603 17,7.25 r90 top value=10K
R243 "RESC0603" RESC0603 18.75,7.25 r90 top value=10K
R257 "RESC0603" RESC0603 38.5,-10.5 r90 top value=1K
R261 "RESC0603" RESC0603 33.25,-10.5 r90 top value=42K2
R270 "RESC0603" RESC0603 -80.511,169.708 r90 top value=100K
R271 "RESC0603" RESC0603 -85.161,169.708 r90 top value=4M75
R277 "RESC0603" RESC0603 -74.311,169.708 r90 top value=10K
R279 "RESC0603" RESC0603 -77.411,169.708 r90 top value=10K
R280 "RESC0603" RESC0603 -86.711,169.708 r90 top value=10K
R314 "RESC0603" RESC0603 35,-10.5 r270 top value=1K27
R316 "RESC0603" RESC0603 41.25,-1.5 r180 top value=2M74
R? "RESC0603" RESC0603 221.869,-35.115 r0 top value=10K
R? "RESC0603" RESC0603 159.869,-35.115 r0 top value=10K
R? "RESC0603" RESC0603 203.119,-35.115 r0 top value=10K
R? "RESC0603" RESC0603 164.119,-35.115 r0 top value=10K
R? "RESC0603" RESC0603 248.619,-35.115 r0 top value=10K
R? "RESC0603" RESC0603 230.619,-35.115 r0 top value=10K
R? "RESC0603" RESC0603 185.369,-25.615 r0 top value=10K
R? "RESC0603" RESC0603 181.119,-25.615 r0 top value=10K
R? "RESC0603" RESC0603 123.869,-25.615 r0 top value=10K
R? "RESC0603" RESC0603 258.119,-35.115 r0 top value=10K
R? "RESC0603" RESC0603 193.619,-35.115 r0 top value=10K
R? "RESC0603" RESC0603 209.619,-25.615 r0 top value=10K
SW1 "SWITCH-E-SWITCH-TL1105SFP" SWITCH-ESWITCH-TL1105SPF-1RCAP -66.911,165.008 r0 top
SW2 "SWITCH-E-SWITCH-TL1105SFP" SWITCH-ESWITCH-TL1105SPF-1RCAP -75.561,165.008 r0 top
SW3 "SWITCH-E-SWITCH-TL1105SFP" SWITCH-ESWITCH-TL1105SPF-1RCAP -58.261,165.008 r0 top
SW5 "SWITCH-E-SWITCH-TL1105SFP" SWITCH-ESWITCH-TL1105SPF-1RCAP -40.961,165.008 r0 top
SW6 "SWITCH-E-SWITCH-TL1105SFP" SWITCH-ESWITCH-TL1105SPF-1RCAP -49.611,165.008 r0 top
SW7 "SWITCH-E-SWITCH-TL1105SFP" SWITCH-ESWITCH-TL1105SPF-1RCAP -110.161,165.008 r0 top
SW8 "SWITCH-E-SWITCH-TL1105SFP" SWITCH-ESWITCH-TL1105SPF-1RCAP -118.811,165.008 r0 top
SW9 "SWITCH-E-SWITCH-TL1105SFP" SWITCH-ESWITCH-TL1105SPF-1RCAP -101.511,165.008 r0 top
SW10 "SWITCH-E-SWITCH-TL1105SFP" SWITCH-ESWITCH-TL1105SPF-1RCAP -84.211,165.008 r0 top
SW11 "SWITCH-E-SWITCH-TL1105SFP" SWITCH-ESWITCH-TL1105SPF-1RCAP -92.861,165.008 r0 top
SW12 "SWITCH-E-SWITCH-TL1105SFP" SWITCH-ESWITCH-TL1105SPF-1RCAP 19.589,165.008 r0 top
SW13 "SWITCH-E-SWITCH-TL1105SFP" SWITCH-ESWITCH-TL1105SPF-1RCAP 10.939,165.008 r0 top
SW14 "SWITCH-E-SWITCH-TL1105SFP" SWITCH-ESWITCH-TL1105SPF-1RCAP 36.889,165.008 r0 top
SW15 "SWITCH-E-SWITCH-TL1105SFP" SWITCH-ESWITCH-TL1105SPF-1RCAP 28.239,165.008 r0 top
SW16 "SWITCH-E-SWITCH-TL1105SFP" SWITCH-ESWITCH-TL1105SPF-1RCAP 2.289,165.008 r0 top
SW17 "SWITCH-E-SWITCH-TL1105SFP" SWITCH-ESWITCH-TL1105SPF-1RCAP -23.661,165.008 r0 top
SW18 "SWITCH-E-SWITCH-TL1105SFP" SWITCH-ESWITCH-TL1105SPF-1RCAP -32.311,165.008 r0 top
SW19 "SWITCH-E-SWITCH-TL1105SFP" SWITCH-ESWITCH-TL1105SPF-1RCAP -6.361,165.008 r0 top
SW20 "SWITCH-E-SWITCH-TL1105SFP" SWITCH-ESWITCH-TL1105SPF-1RCAP -15.011,165.008 r0 top
SW22 "CJS1200" SWITCH-NIDEC-CJS-1200TB1 36.5,59.5 r0 top
U7 "ATL431B 48ppm 0.5%" SOT23 18.5,38.5 r0 top
U8 "DG451" SO127P600-16N 153.975,-2.595 r0 top
U9 "ATL431B 48ppm 0.5%" SOT23 151.37,-70.865 r0 top
U11 "LM675" TO220-5-V -0.595,-1.3 r90 top
U12 "TLV7211" SO127P600-8N 27,28.75 r0 top
U13 "CD4053" SO127P600-16N 164.275,-2.095 r0 top
U14 "LM393" SO127P600-8N 170.25,-28.5 r0 top
U15 "AD633JR" SO127P600-8N 158.5,-15 r0 top
U16 "MCP4551T-103" SO65P490-8N 27,12 r0 top
U17 "IC-TI-74HC14" SOT23-6 51.464,163.408 r0 top
U18 "AC005-S05" MODULE-ADAMTECH-AC005-S05 -40.25,38 r0 top
U19 "DWN06C-05" MODULE-MEANWELL-DCWN06C -50.25,-23.5 r90 top
U20 "IRM-45-48" MODULE-MEANWELL-IRM-45-48 -93,-11 r90 top
U21 "DWN06C-15" MODULE-MEANWELL-DCWN06C -50.25,-44.75 r90 top
U22 "CD4066" SO127P600-14N 239.369,-21.865 r0 top
U25 "CD4013" SO127P600-14N 27,61 r270 top
U26 "TL081H" SO127P600-8N 160.369,-62.865 r0 top
U30 "TL082H" SO127P600-8N 27,5.5 r0 top
U31 "TL082H" SO127P600-8N 37.25,5.5 r0 top
U32 "TL082H" SO127P600-8N 27,-10.75 r0 top
U101 "TL082H" SO127P600-8N 187.369,-33.115 r0 top
U203 "LF412" SO127P600-8N 166.75,37.75 r0 top
U206 "CD4053" SO127P600-16N 185.525,-26.115 r0 top
U208 "LF412" SO127P600-8N 178.25,-9.25 r0 top
U209 "LF412" SO127P600-8N 154.75,34.75 r0 top
U213 "CD4053" SO127P600-16N 27,-2.75 r270 top
U1000 "TL082H" SO127P600-8N 27,38 r0 top
U1001 "TL082H" SO127P600-8N 27,19.5 r0 top
U1002 "74LVC14" SO127P600-14N 27,52.5 r270 top
U? "CP2102" SO127P600-16N 145.369,-21.115 r0 top
U? "TL084H" SO127P600-14N 169.619,-21.865 r0 top
U? "74V1G3157" SOT23-6 223.619,-24.615 r0 top
U? "DG470" SO127P600-8N 140.369,-33.115 r0 top
U? "ATMEGA4809" QFN50P700X700X-44-TH520X520 248.369,-22.615 r0 top
U? "TL084H" SO127P600-14N 216.369,-21.865 r0 top
U? "TL084H" SO127P600-14N 230.619,-21.865 r0 top
U? "74V1G3157" SOT23-6 158.119,-24.615 r0 top
U? "TL084H" SO127P600-14N 197.869,-21.865 r0 top
U? "TL084H" SO127P600-14N 136.369,-21.865 r0 top
VR202 "TRIMMER-BOURNS-3214X-1-104" TRIMMER-BOURNS-3214X 18.75,13.25 r270 top value=100K
VR211 "TRIMMER-BOURNS-3214X-1-103E" TRIMMER-BOURNS-3214X 36.25,-2.75 r90 top value=10K

## Footprints (in the part's own frame and the unit in brackets; to place one, negate y for a bottom-side part, rotate by r counter-clockwise, add the part's x,y. Pads: shape width x height; smd on the part's side, far side on the other; paste and mask are expansions set on the pad)
CAPAE-KEMET-ESL476M100AH9AA [mm] "CAPACITOR,ALU-EL,KEMET-ESL476M100AH9AA"
  round 1.6 hole 1 unplated: 1(-2.5,0) 2(2.5,0)
  silkscreen extent -1.38,-1.75 1.38,1.7, body extent -5.25,-5.27 5.25,5.25, height 14.02
CAPAE-KEMET-ESW476M035AE3AA [mm] "CAPACITOR,ALU-EL,KEMET-ESW476M035AE3AA"
  round 1.6 hole 0.8 unplated: 1(-1.25,0) 2(1.25,0)
  silkscreen extent 1.2,-2.45 1.3,2.45, body extent -3.37,-3.4 3.42,3.41, height 12.52
CAPAE-NICHICON-LGY2A222MELC30 [mm] "CAPACITOR,ALU-EL,SNAP-IN,NICHICON,LGY2A222MELC30"
  round 3.5 hole 2.1 unplated: 1(-5,0) 2(5,0)
  silkscreen extent -17.58,-17.63 17.63,17.58, body extent -17.5,-17.52 17.5,17.5, height 35.01
CAPC0603 [mm] "CAPACITOR, CHIP 0603 (1608) 0.5MM THICK"
  rrect25% 0.72x0.99 smd paste+0 mask+0.075: 1(-0.69,0) 2(0.69,0)
  body extent -0.81,-0.41 0.81,0.41, height 0.51
CAPC0805 [mm] "CAPACITOR, CHIP 0805 (2012) 0.85MM THICK"
  rrect25% 1.05x1.4 smd paste+0 mask+0.075: 1(-0.95,0) 2(0.95,0)
  body extent -1.01,-0.63 1.01,0.64, height 0.86
CAPF50P720X720 [mm]
  round 1.4 hole 0.8 unplated: 1(-2.5,0) 2(2.5,0)
  body extent -3.6,-3 3.6,3, height 11.01
CONN-BNC-RA-TE-CONBNC002 [mm]
  round 1.7 hole 1 paste-2539.97 mask-1: 1(-5.08,0) 2(-5.08,2.54)
  round 3.5 hole 2 paste-2539.97 mask-1: 3(0,5.08) 4(0,-5.08)
  body extent -5.82,-7.95 29.38,7.95, height 14.35
CONN-MOLEX-430450214 [mm] "CONN-MOLEX-430450214"
  rect 1.65x1.65 hole 1 mask+0.1: 1(-0.001,-1.975)
  round 1.65 hole 1 mask+0.1: 2(-0.001,1.025)
  round 0.65 hole 1 unplated mask+0.15: 3(2.999,1.975) 4(-2.999,1.975)
  body extent -3.58,-4.37 3.57,4.4, height 9.9
CONN-MOLEX-430450613 [mm]
  rrect50% 1.52x1.52 hole 1.02 mask+0.076: 1(3,-1.97)
  round 1.52 hole 1.02 mask+0.076: 2(0,-1.97) 3(-3,-1.97) 4(3,1.03) 5(0,1.03) 6(-3,1.03)
  round 1.02 hole 1.02 unplated mask+0.076: ""(-6,1.97) ""(6,1.97)
  silkscreen extent 6.93,-2.37 7.63,-1.57, body extent -6.57,-4.44 6.58,4.33, height 9.92
"CONNECTOR GENERIC-BOXHEADER-2X10" [mm] "CONNECTOR GENERIC-BOXHEADER-2X10"
  rect 1.5x1.5 hole 1 mask+0.075: 1(-1.27,11.43)
  round 1.5 hole 1 mask+0.075: 2(1.27,11.43) 3(-1.27,8.89) 4(1.27,8.89) 5(-1.27,6.35) 6(1.27,6.35) 7(-1.27,3.81) 8(1.27,3.81) 9(-1.27,1.27) 10(1.27,1.27) 11(-1.27,-1.27) 12(1.27,-1.27) 13(-1.27,-3.81) 14(1.27,-3.81) 15(-1.27,-6.35) 16(1.27,-6.35) 17(-1.27,-8.89) 18(1.27,-8.89) 19(-1.27,-11.43) 20(1.27,-11.43)
  silkscreen extent -4.45,15.76 -3.7,16.51, body extent -4.45,-16.51 4.45,16.51, height 8.81
CONNECTOR-GENERIC-PINHEADER-2X8 [mm] "CONNECTOR GENERIC-PINHEADER-2X8"
  rect 1.65x1.65 hole 1 mask+0.1: 1(-8.883,-1.258)
  round 1.65 hole 1 mask+0.1: 2(-8.883,1.282) 3(-6.343,-1.258) 4(-6.343,1.282) 5(-3.803,-1.258) 6(-3.803,1.282) 7(-1.263,-1.258) 8(-1.263,1.282) 9(1.277,-1.258) 10(1.277,1.282) 11(3.817,-1.258) 12(3.817,1.282) 13(6.357,-1.258) 14(6.357,1.282) 15(8.897,-1.258) 16(8.897,1.282)
  body extent -10.16,-2.54 10.16,2.54, height 9.26
DO214AC [mm] "DO214AC, SMA"
  rrect20% 2x2 smd mask+0.07: 1(-2.25,0) 2(2.25,0)
  silkscreen extent -3.25,1.38 -2.5,1.38, body extent -2.6,-1.45 2.6,1.45, height 2.31
DPAK [mm]
  rrect25% 3x1 smd mask+0.075: 1(-3.59,2.285) 3(-3.59,-2.285)
  rrect10% 6.2x5.8 smd paste-7 mask+0.075: 4(3.59,-0.005)
  silkscreen extent -5.2,3.37 -4.45,3.37, body extent -4.01,-3.28 5.93,3.26, height 2.34
HEATSINK-CUI-HSS01-B20-CP [mm] "HEATSINK-CUI-HSS01-B20-CP"
  round 5 hole 3.2 unplated: ME1(-13.8,-4.45) ME2(13.8,-4.45)
  body extent -24.13,-24.13 24.13,0, height 49.32
LED-3MM-GREEN [mm]
  round 1.5 hole 1: 1(1.27,0) 2(-1.27,0)
  silkscreen extent -2,-2.1 1.69,2.1, body extent -1.99,-1.96 1.63,1.96, height 5.35
MODULE-ADAMTECH-AC005-S05 [mm] "MODULE-ADAMTECH-AC005-S05"
  round 2 hole 1.3 unplated: 1(-22.86,10.16) 2(-22.735,-10.16) 3(22.86,10.16) 4(22.86,0)
  body extent -25.4,-12.65 25.4,12.7, height 17.2
MODULE-MEANWELL-DCWN06C [mm] "MODULE-MEANWELL-DCWN06C"
  round 1.8 hole 1.1 unplated: 2(-7.62,11.43) 3(-7.62,8.89) 9(-7.62,-6.35) 11(-7.62,-11.43) 14(7.62,-11.43) 16(7.62,-6.35) 22(7.62,8.89) 23(7.62,11.43)
  body extent -10.15,-15.9 10.15,15.9, height 10.2
MODULE-MEANWELL-IRM-45-48 [mm] "MODULE-MEANWELL-IRM-45-48"
  round 2.2 hole 1.3 unplated: 1(38,-13.875) 2(38,-20.625)
  round 3.3 hole 2.4 unplated: 3(-38,20.625) 4(-38,15.125)
  body extent -43.7,-25.63 43.3,26.37, height 29.51
QFN50P700X700X-44-TH520X520 [mm] "QFN, 44-Leads, Body 7.00x7.00mm, Pitch 0.50mm, Thermal Pad 5.20x5.20mm, IPC High Density"
  rrect40% 0.85x0.25 smd mask+0.05: 1(-3.3,2.5) 2(-3.3,2) 3(-3.3,1.5) 4(-3.3,1) 5(-3.3,0.5) 6(-3.3,0) 7(-3.3,-0.5) 8(-3.3,-1) 9(-3.3,-1.5) 10(-3.3,-2) 11(-3.3,-2.5) 23(3.3,-2.5) 24(3.3,-2) 25(3.3,-1.5) 26(3.3,-1) 27(3.3,-0.5) 28(3.3,0) 29(3.3,0.5) 30(3.3,1) 31(3.3,1.5) 32(3.3,2) 33(3.3,2.5)
  rrect40% 0.25x0.85 smd mask+0.05: 12(-2.5,-3.3) 13(-2,-3.3) 14(-1.5,-3.3) 15(-1,-3.3) 16(-0.5,-3.3) 17(0,-3.3) 18(0.5,-3.3) 19(1,-3.3) 20(1.5,-3.3) 21(2,-3.3) 22(2.5,-3.3) 34(2.5,3.3) 35(2,3.3) 36(1.5,3.3) 37(1,3.3) 38(0.5,3.3) 39(0,3.3) 40(-0.5,3.3) 41(-1,3.3) 42(-1.5,3.3) 43(-2,3.3) 44(-2.5,3.3)
  rrect1% 5.2x5.2 smd mask+0.05: 45(0,0)
  silkscreen extent -3.65,-3.65 3.65,3.65, body extent -3.52,-3.52 3.52,3.52, height 1
RELAY-CIT-J104B2C5VDC.20S [mm]
  round 1.8 hole 1.1 unplated: 1(-8.89,-3.81) 2(-1.27,-3.81) 3(3.81,-3.785) 4(8.89,-3.81) 5(8.89,3.81) 6(3.81,3.81) 7(-1.27,3.81) 8(-8.89,3.81)
  body extent -10.09,-4.97 10.09,4.98, height 10.96
RELAY-KEMET-UA2-5NJ [mm]
  round 1.2 hole 0.7 unplated: 1(-3.8,-1.562) 2(-0.6,-1.588) 3(1.6,-1.612) 4(3.8,-1.637) 5(3.8,1.638) 6(1.6,1.638) 7(-0.6,1.638) 8(-3.8,1.638)
  body extent -5.6,-3 5.3,3, height 8.31
RESC0603 [mm] "RESISTOR, CHIP 0603 (1608)"
  rrect25% 0.72x0.99 smd paste+0 mask+0.075: 1(-0.69,0) 2(0.69,0)
  body extent -0.8,-0.4 0.8,0.4, height 0.37
RESC0805 [mm] "RESISTOR, CHIP 0805 (2012)"
  rrect25% 1.05x1.4 smd paste+0 mask+0.075: 1(-0.95,0) 2(0.95,0)
  body extent -1,-0.63 1,0.63, height 0.47
RESC1206 [mm] "RESISTOR, CHIP 1206 (3216)"
  rrect25% 1.05x1.8 smd paste+0 mask+0.075: 1(-1.5,0) 2(1.5,0)
  body extent -1.55,-0.78 1.55,0.78, height 0.47
SO65P490-8N [mm] "MSOP8, 0.65MM PITCH, 4.90MM SPAN, 1.15MM HEIGHT"
  rrect25% 1.45x0.395 smd mask+0.075: 1(-2.2,0.975) 2(-2.2,0.325) 3(-2.2,-0.325) 4(-2.2,-0.975) 5(2.2,-0.975) 6(2.2,-0.325) 7(2.2,0.325) 8(2.2,0.975)
  silkscreen extent -3.03,1.63 -2.27,1.63, body extent -2.45,-1.5 2.45,1.5, height 1.15
SO127P600-8N [mm] "SO8"
  rrect25% 1.45x0.6 smd mask+0.075: 1(-2.725,1.905) 2(-2.725,0.635) 3(-2.725,-0.635) 4(-2.725,-1.905) 5(2.725,-1.905) 6(2.725,-0.635) 7(2.725,0.635) 8(2.725,1.905)
  silkscreen extent -3.55,2.63 -2.8,2.63, body extent -3.1,-2.5 3.1,2.5, height 1.75
SO127P600-14N [mm] "SOIC127P600X175 14N"
  rrect25% 1.6x0.6 smd mask+0.075: 1(-2.7,3.81) 2(-2.7,2.54) 3(-2.7,1.27) 4(-2.7,0) 5(-2.7,-1.27) 6(-2.7,-2.54) 7(-2.7,-3.81) 8(2.7,-3.81) 9(2.7,-2.54) 10(2.7,-1.27) 11(2.7,0) 12(2.7,1.27) 13(2.7,2.54) 14(2.7,3.81)
  silkscreen extent -3.6,4.47 -2.85,4.47, body extent -3,-4.37 3,4.38, height 1.75
SO127P600-16N [mm] "SO16"
  rrect25% 1.45x0.6 smd mask+0.075: 1(-2.725,4.445) 2(-2.725,3.175) 3(-2.725,1.905) 4(-2.725,0.635) 5(-2.725,-0.635) 6(-2.725,-1.905) 7(-2.725,-3.175) 8(-2.725,-4.445) 9(2.725,-4.445) 10(2.725,-3.175) 11(2.725,-1.905) 12(2.725,-0.635) 13(2.725,0.635) 14(2.725,1.905) 15(2.725,3.175) 16(2.725,4.445)
  silkscreen extent -3.1,5.05 -2.35,5.05, body extent -3.1,-5.05 2.9,5.05, height 1.35
SO254P960-6N [mil] "Surface Mount DIP Optocoupler  0.4 in wide"
  rrect25% 50x80 smd: 1(-100,-200) 2(0,-200) 3(100,-200) 4(100,200) 5(0,200) 6(-100,200)
  silkscreen extent -143,-228 -143,-172, body extent -169,-203 169,203, height 172
SO508P1676-8N [mm]
  rrect8% 3x1.2 smd paste+0 mask+0.05: 1(-7.95,8.89) 2(-7.95,3.81) 3(-7.95,-3.81) 4(-7.95,-8.89) 5(7.95,-8.89) 6(7.95,-3.81) 7(7.95,3.81) 8(7.95,8.89)
  silkscreen extent -8.5,9.87 -7.37,9.87, body extent -8.38,-10.54 8.38,10.54, height 3.49
SOT23 [mm] "SOT23 PACKAGE, 3 PIN"
  rrect25% 1x0.6 smd paste+0 mask+0.075: 1(-1.15,0.95) 2(-1.15,-0.95) 3(1.15,0)
  silkscreen extent -1.75,1.55 -1,1.55, body extent -1.4,-1.45 1.4,1.45, height 1.3
SOT23-6 [mm] "SOT23 PACKAGE, 6 PIN (SOT26)"
  rrect25% 1.05x0.55 smd paste+0 mask+0.05: 1(-1.25,0.95) 2(-1.25,0) 3(-1.25,-0.95) 4(1.25,-0.95) 5(1.25,0) 6(1.25,0.95)
  silkscreen extent -1.88,1.58 -1.12,1.58, body extent -1.4,-1.45 1.4,1.45, height 1.45
SWITCH-ESWITCH-TL1105SPF-1RCAP [mm] "SWTICH,TACT,MOM,WITH 1R CAP,E-SWITCH TL1105SP"
  round 1.6 hole 1: 1(-3.25,-2.25) 2(3.25,-2.25) 3(-3.25,2.25) 4(3.25,2.275)
  body extent -3.94,-3 3.94,3, height 13.5
SWITCH-NIDEC-CJS-1200TB1 [mm] "SWITCH-NIDEC-CJS-1200TB1"
  rrect20% 1.3x1 smd mask+0.05: 1(-1.95,1.739) 2(-1.95,-1.761) 3(1.95,-0.011)
  silkscreen extent -2.37,2.47 -1.55,2.47, body extent -2.1,-3.01 2.1,2.99, height 2.53
TO220-5-V [mm] "TO220,PENTAWATT,VERTICAL"
  oval 2x2.4 hole 1.2: 1(-3.4,-1.905) 2(-1.7,1.905) 3(0,-1.905) 4(1.7,1.905) 5(3.4,-1.905)
  body extent -5.12,-2.13 5.11,6.58, height 21.54
TRIMMER-BOURNS-3214X [mm] "RESSITOR,TRIMMER,BOURNS,3214X FAMILY"
  rrect7% 1.9x1.3 smd: 1(-2.55,1.25) 3(-2.55,-1.25)
  rrect5% 1.9x2 smd: 2(2.55,0)
  body extent -2.83,-2.32 2.88,2.48, height 5.31

## Part data
C1 C4 C6 C8 C10 C11 C12 C13 C14 C15 C16 C17 C18 C19 C20 C22 C24 C25 C29 C30 C31 C32 C36 C37 C68 C69 C70 C71 C73 C74 C75 C76 C77 C78 C79 C80 C83 C84 C? C? C? C? C? C?: library part CAPC-0603-100nF-50V-X7R, "CAPACITOR,CERAMIC,100nF,50V,X7R,0603", Capacitance=100nF, Dielectric=X7R, LCSC=C127833, Manufacturer 1=KEMET, Manufacturer Part Number 1=C0603C104K5RACTU, Package / Case=0603, Supplier Part Number 1=80-C0603C104K5R7867, Voltage=50V, MOUSER=80-C0603C104K5R, Supplier 1=Mouser, Supplier 2=Mouser, Supplier 3=Avnet, Supplier 4=Digikey, Supplier Part Number 2=80-C0603C104K5R7411, Supplier Part Number 3=KGM15BR71H104KT, Supplier Part Number 4=1276-1000-1-ND
C2 C3 C5 C7 C9: library part CAPC-0805-10uF-25V, "CAPACITOR,CERAMIC,10uF,25V,X5R,0805", Capacitance=10uF, Dielectric=X7R, LCSC=C3039694, Manufacturer 1=SAMSUNG, Manufacturer Part Number 1=CL21B106KAYQNNE, Package / Case="0805 (2012 metric)", Voltage=25V, MOUSER=187-CL21B106KAYQNNE
C21 C33: library part CAPC-0603-10nF-50V-X7R, "CAPACITOR,CERAMIC,10nF,50V,X7R,0603", Capacitance=10nF, Dielectric=X7R, Package / Case=0603, Voltage=50V
C23 C34 C217: library part CAPC-0603-100pF-50V-C0G, "CAPACITOR,CERAMIC,100pF,50V,C0G,0603", Capacitance=100pF, Dielectric=C0G, Package / Case=0603, Voltage=50V
C26 C28: library part CAPP-AE-47uF-100V-TH050P100D140H, "CAPACITOR,ALU,47uF,100V,TH,P5mm,D10mm,H14mm", Capacitance=47uF, Dielectric=AE, Manufacturer 1=KEMET, Manufacturer Part Number 1=ESL476M100AH9AA, Voltage=100V, DIGIKEY=399-15746-ND
C27 C234: library part CAPC-0603-10PF-50V-C0G, "CAPACITOR,CERAMIC,10pF,50V,C0G,0603", Capacitance=10pF, Dielectric=C0G, Manufacturer 1=KYOCERA, Manufacturer Part Number 1=C0603C100J5GAC, Package / Case=0603, Voltage=50V, MOUSER=80-C0603C100J5GAC
C35 C47: library part CAPC-0603-1nF-20V-C0G, "CAPACITOR,CERAMIC,1nF,50V,C0G,0603", Capacitance=1nF, Dielectric=C0G, Package / Case=0603, Voltage=50V
C38 C44 C48 C52 C56 C60: library part CAPP-AE-47uF-35V-TH025P063D125H, "CAPACITOR,ALU,47uF,35V,TH,P0.25mm,D6.3mm,H12.5mm", Capacitance=47uF, Dielectric=AE, Manufacturer 1=KEMET, Manufacturer Part Number 1=ESW476M035AE3AA, Voltage=35V
C39: library part CAPC-0805-100nF-100V, "CAPACITOR,CERAMIC,100nF,100V,X7R,0805", Capacitance=100nF, Dielectric=X7R, Package / Case="0805 (2012 metric)", Voltage=100V
C40: library part CAPP-AE-2200uF-100V-TH100P350D320H, "CAPACITOR,ALU,2200uF,100V,TH,P10mm,D35mm,H32mm,SNAP", Capacitance=2200uF, Dielectric=AE, Manufacturer 1=NICHICON, Manufacturer Part Number 1=LGY2A222MELC30, Voltage=100V
C41 C43 C45 C46: library part CAPC-0805-10nF-50V-C0G, "CAPACITOR,CERAMIC,10nF,100V,C0G,0805", Capacitance=10nF, Dielectric=C0G, Manufacturer 1=KEMET, Manufacturer Part Number 1=C0805C103K5GEC7210, Package / Case="0805 (2012 metric)", Voltage=50V, DIGIKEY=399-C0805C103K5GEC7210CT-ND
C42: library part CAPC-0603-4u7-10V-X5R, "CAPACITOR,CERAMIC,4u7,10V,X5R,0603", Capacitance=4u7, Dielectric=X5R, LCSC=C1705, Manufacturer 1=SAMSUNG, Manufacturer Part Number 1=CL10A475KP8NNNC, Package / Case=0603, Supplier Part Number 1=GRM188Z71A475KE15J, Voltage=10V, MOUSER=187-CL10A475KP8NNNC, Supplier 1="Arrow Electronics"
C72: library part CAPF-100nF-100V, "CAPACITOR,POLYPROP,100nF,100V", Capacitance=100nF, Dielectric=PP, Manufacturer 1=KEMET, Manufacturer Part Number 1=PHE426DJ6100JR05, Package / Case=CAPF50P720X720, Voltage=100V, DIGIKEY=399-11462-ND
C81: library part CAPC-0603-1n5-50V-X7R, "CAPACITOR,CERAMIC,1n5,50V,X7R,0603", Capacitance=1n5, Dielectric=X7R, Package / Case=0603, Voltage=50V
D1 D2 D3 D4 D5 D6 D7 D8 D9 D10 D11 D12 D13 D14 D15 D16 D17 D18 D19 D20 D21 D40 D47: "LED,TH,GREEN,42mCd,3MM", Manufacturer 1=WURTH, Manufacturer Part Number 1=151031VS06000, Supplier Part Number 1=78-VLMPG33N1P2, MOUSER=78-VLMPG33N1P2, Supplier 1=Mouser
D22 D23 D28 D29 D30 D38 D87: library part DIODE-CENTRALSEMI-CMPD6001S, "DIODE,75V,250mA,SOT23,500pA ULTRA LOW LEAKAGE", Manufacturer 1="CENTRAL SEMICONDUCTOR", Manufacturer Part Number 1=CMPD6001S
  D22 D87: DIGIKEY=1514-CMPD6001STRPBFREECT-ND
D31 D32 D33 D36 D37 D41 D42 D46 D80 D81 D82 D83 D84 D85 D86 D? D? D? D?: library part DIODE-RECTIFIER-DIODES-BAS16-SOT23, "DIODE,RECTIFIER,75V,0.3A,BAS16,SOT23", Manufacturer 1=ONSEMI, Manufacturer Part Number 1=BAS16LT1G
  D41 D42 D46 D80 D81 D82 D83 D84 D85 D86 D? D? D? D?: DIGIKEY=BAS16LT1GOSCT-ND
D34 D35 D60 D63 D67 D68 D70 D73 D215 D231: library part DIODE-ONSEMI-NRVA4007T3G, "DIODE,RECTIFIER,1000V,1A,ONSEMI,NRVA4007,SMA", Manufacturer 1=ONSEMI, Manufacturer Part Number 1=NRVA4007T3G, DIGIKEY=NRVA4007T3GOSCT-ND
D?: library part TVS-NEXPERIA-PESD2USB5UX-TR, "DIODE,TVS,DUAL,NIDIRETIONAL,USB,PESD2USB5UX-TR,SOT23", Manufacturer 1=NEXPERIA, Manufacturer Part Number 1=PESD2USB5UX-TR, DIGIKEY=1727-PESD2USB5UX-CT-ND
DISP1: "DISPLAY,LCD,ALPHA,2X40CHAR,HD44780,YELLOW BL"
HS9: "HEATSINKSTAMPED,CLIP-ON,BOARDMOUNT,3W,25C/W,CUI,HSS01-B20-CP", Manufacturer 1=CUI, Manufacturer Part Number 1=HSS01-B20-CP, DIGIKEY=HSS01-B20-CP
J1 J2: library part CONN-BOXHEADER-10X2
J3: "CONN,2X3,MOLEX MICROFIT,TH,VERT"
J4: library part CONN-MOLEX-430450214, "CONN,1X2,MOLEX, MICROFIT,VERT"
JX JY JZ: library part CONN-BNC-RA-TE-CONBNC002
K1 K2 K3 K4 K5 K7 K10: "RELAY,DPDT,1A,250VAC,220VDC,5V COIL,KEMET,UA2-5NJ", Manufacturer 1=KEMET, Manufacturer Part Number 1=UA2-5NJ, DIGIKEY=399-UA2-5NJ-ND
K6 K9: "RELAY,OPTOMOS,6A,60V,AC,IXYS,CPC1907B,SMD"